# EAGLE board SparkFun-ESP8266-Development-Board-Panel-v10a (EAGLE 7.6.0), part 1 of 7
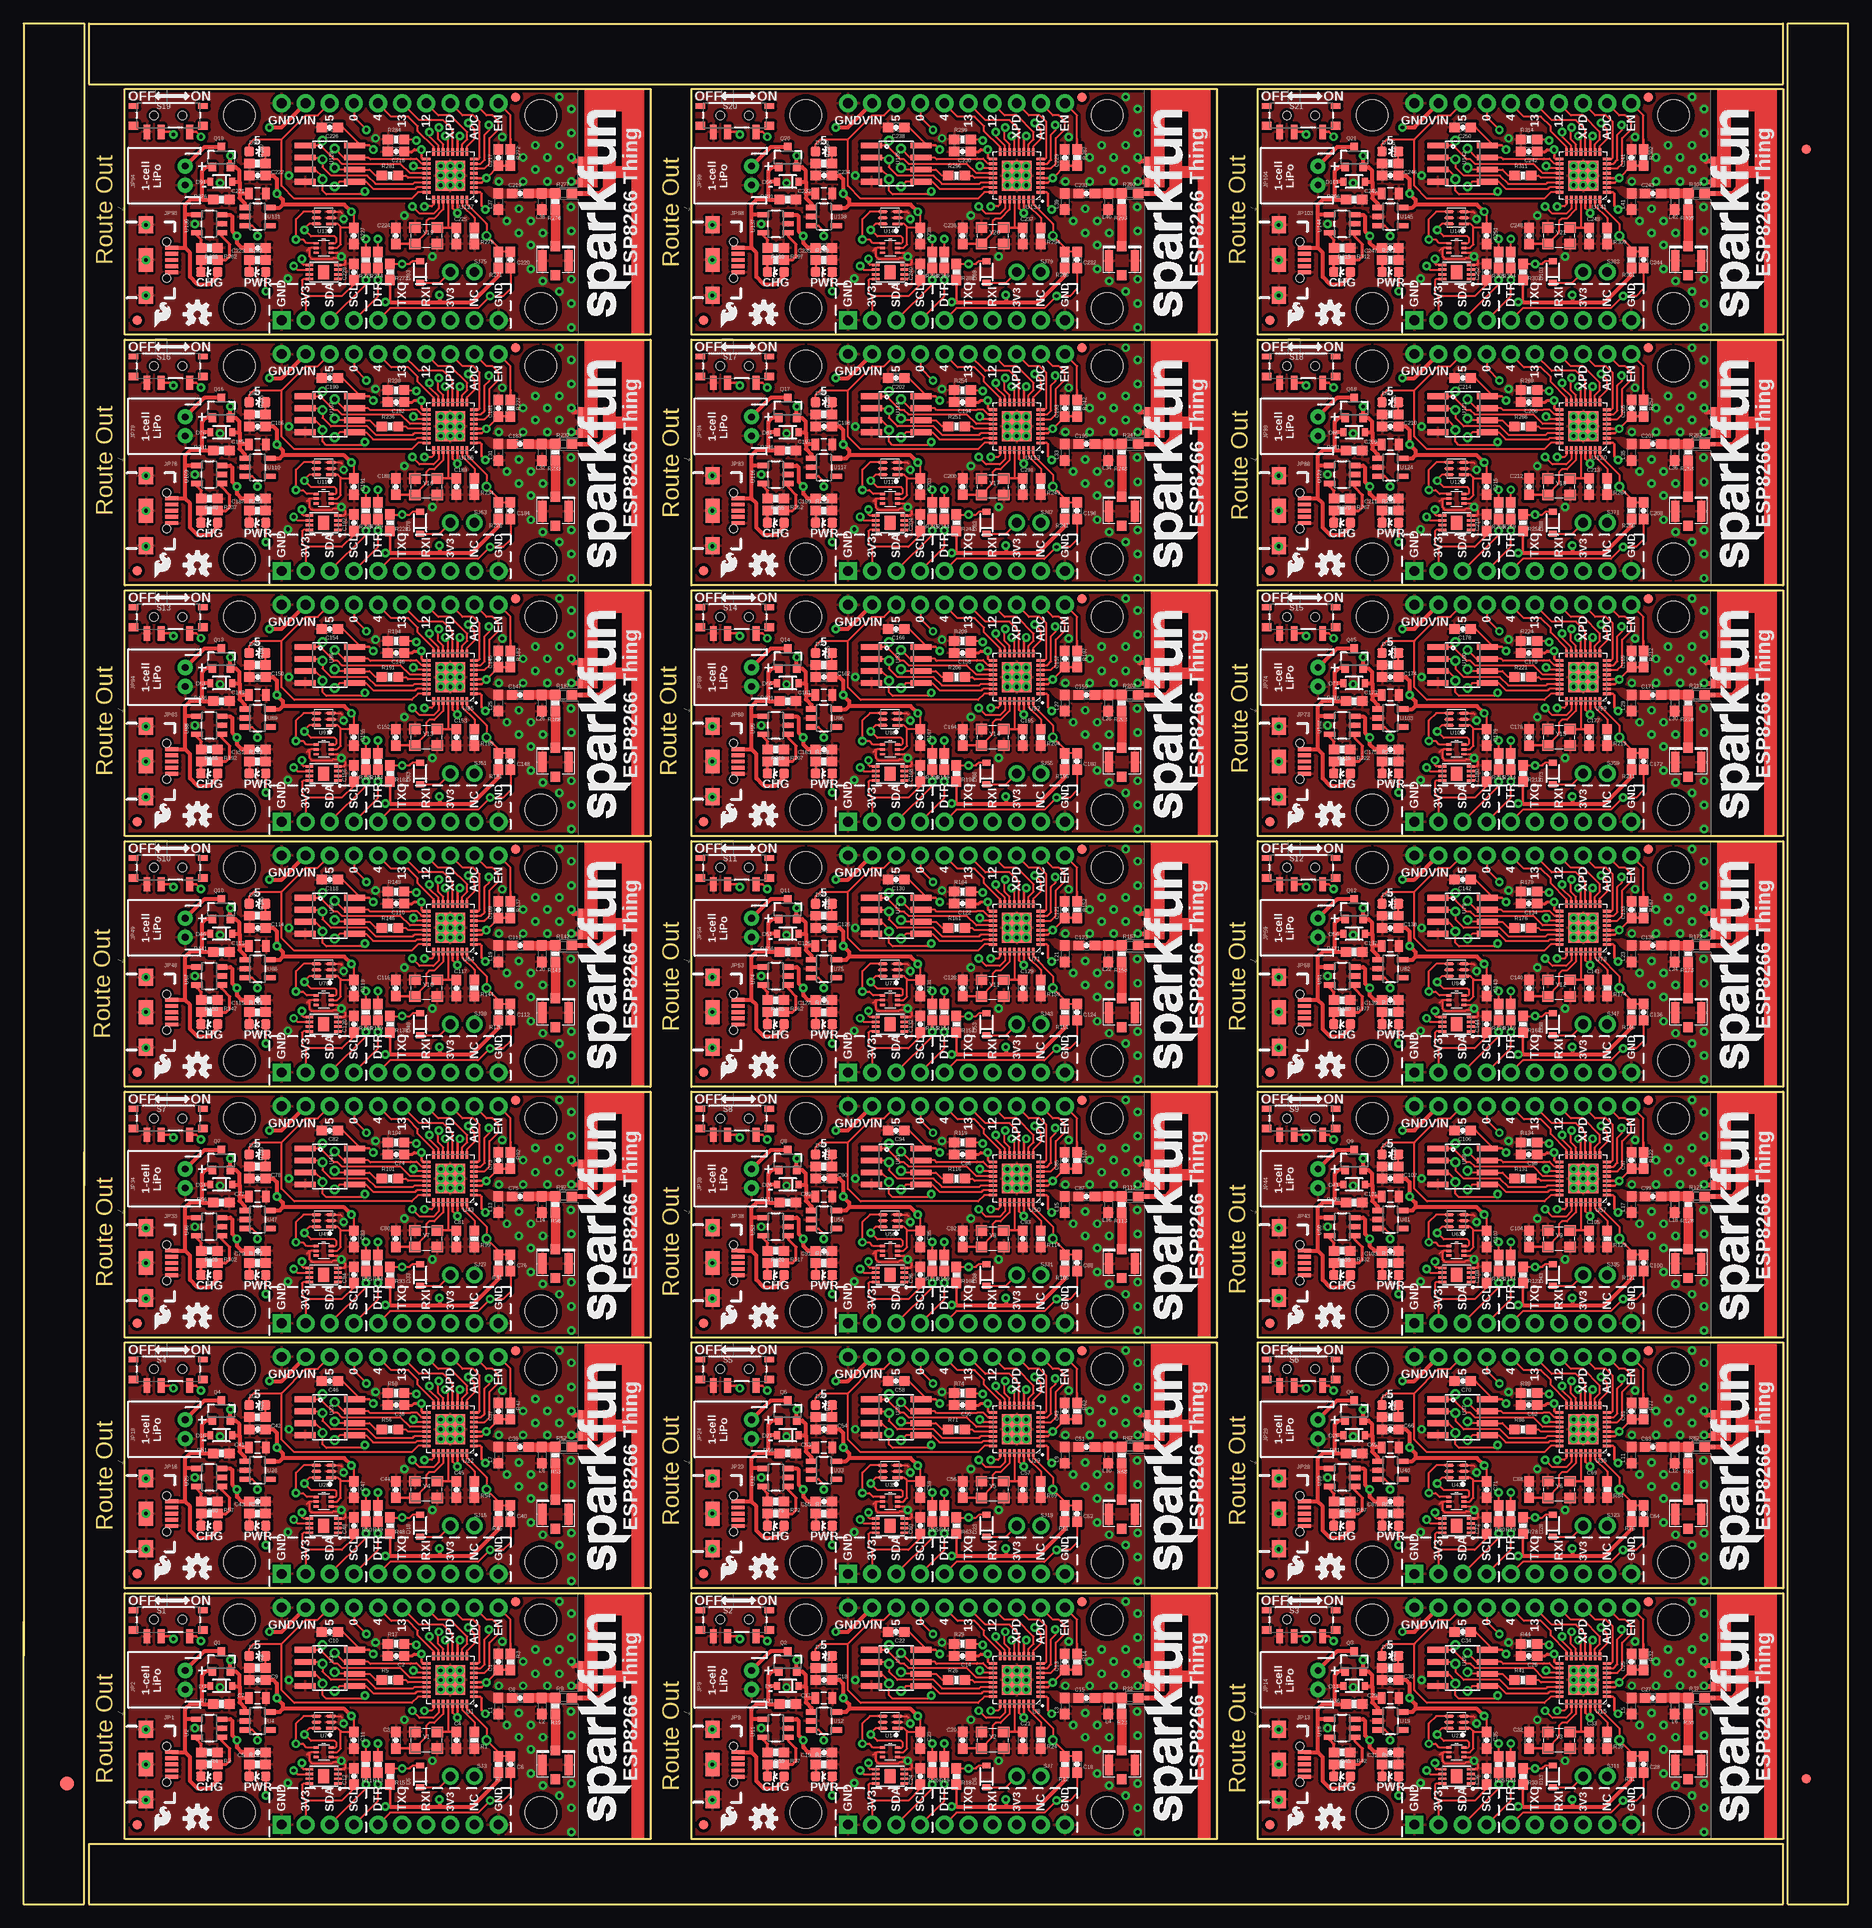
[diagram p0: board, top side]
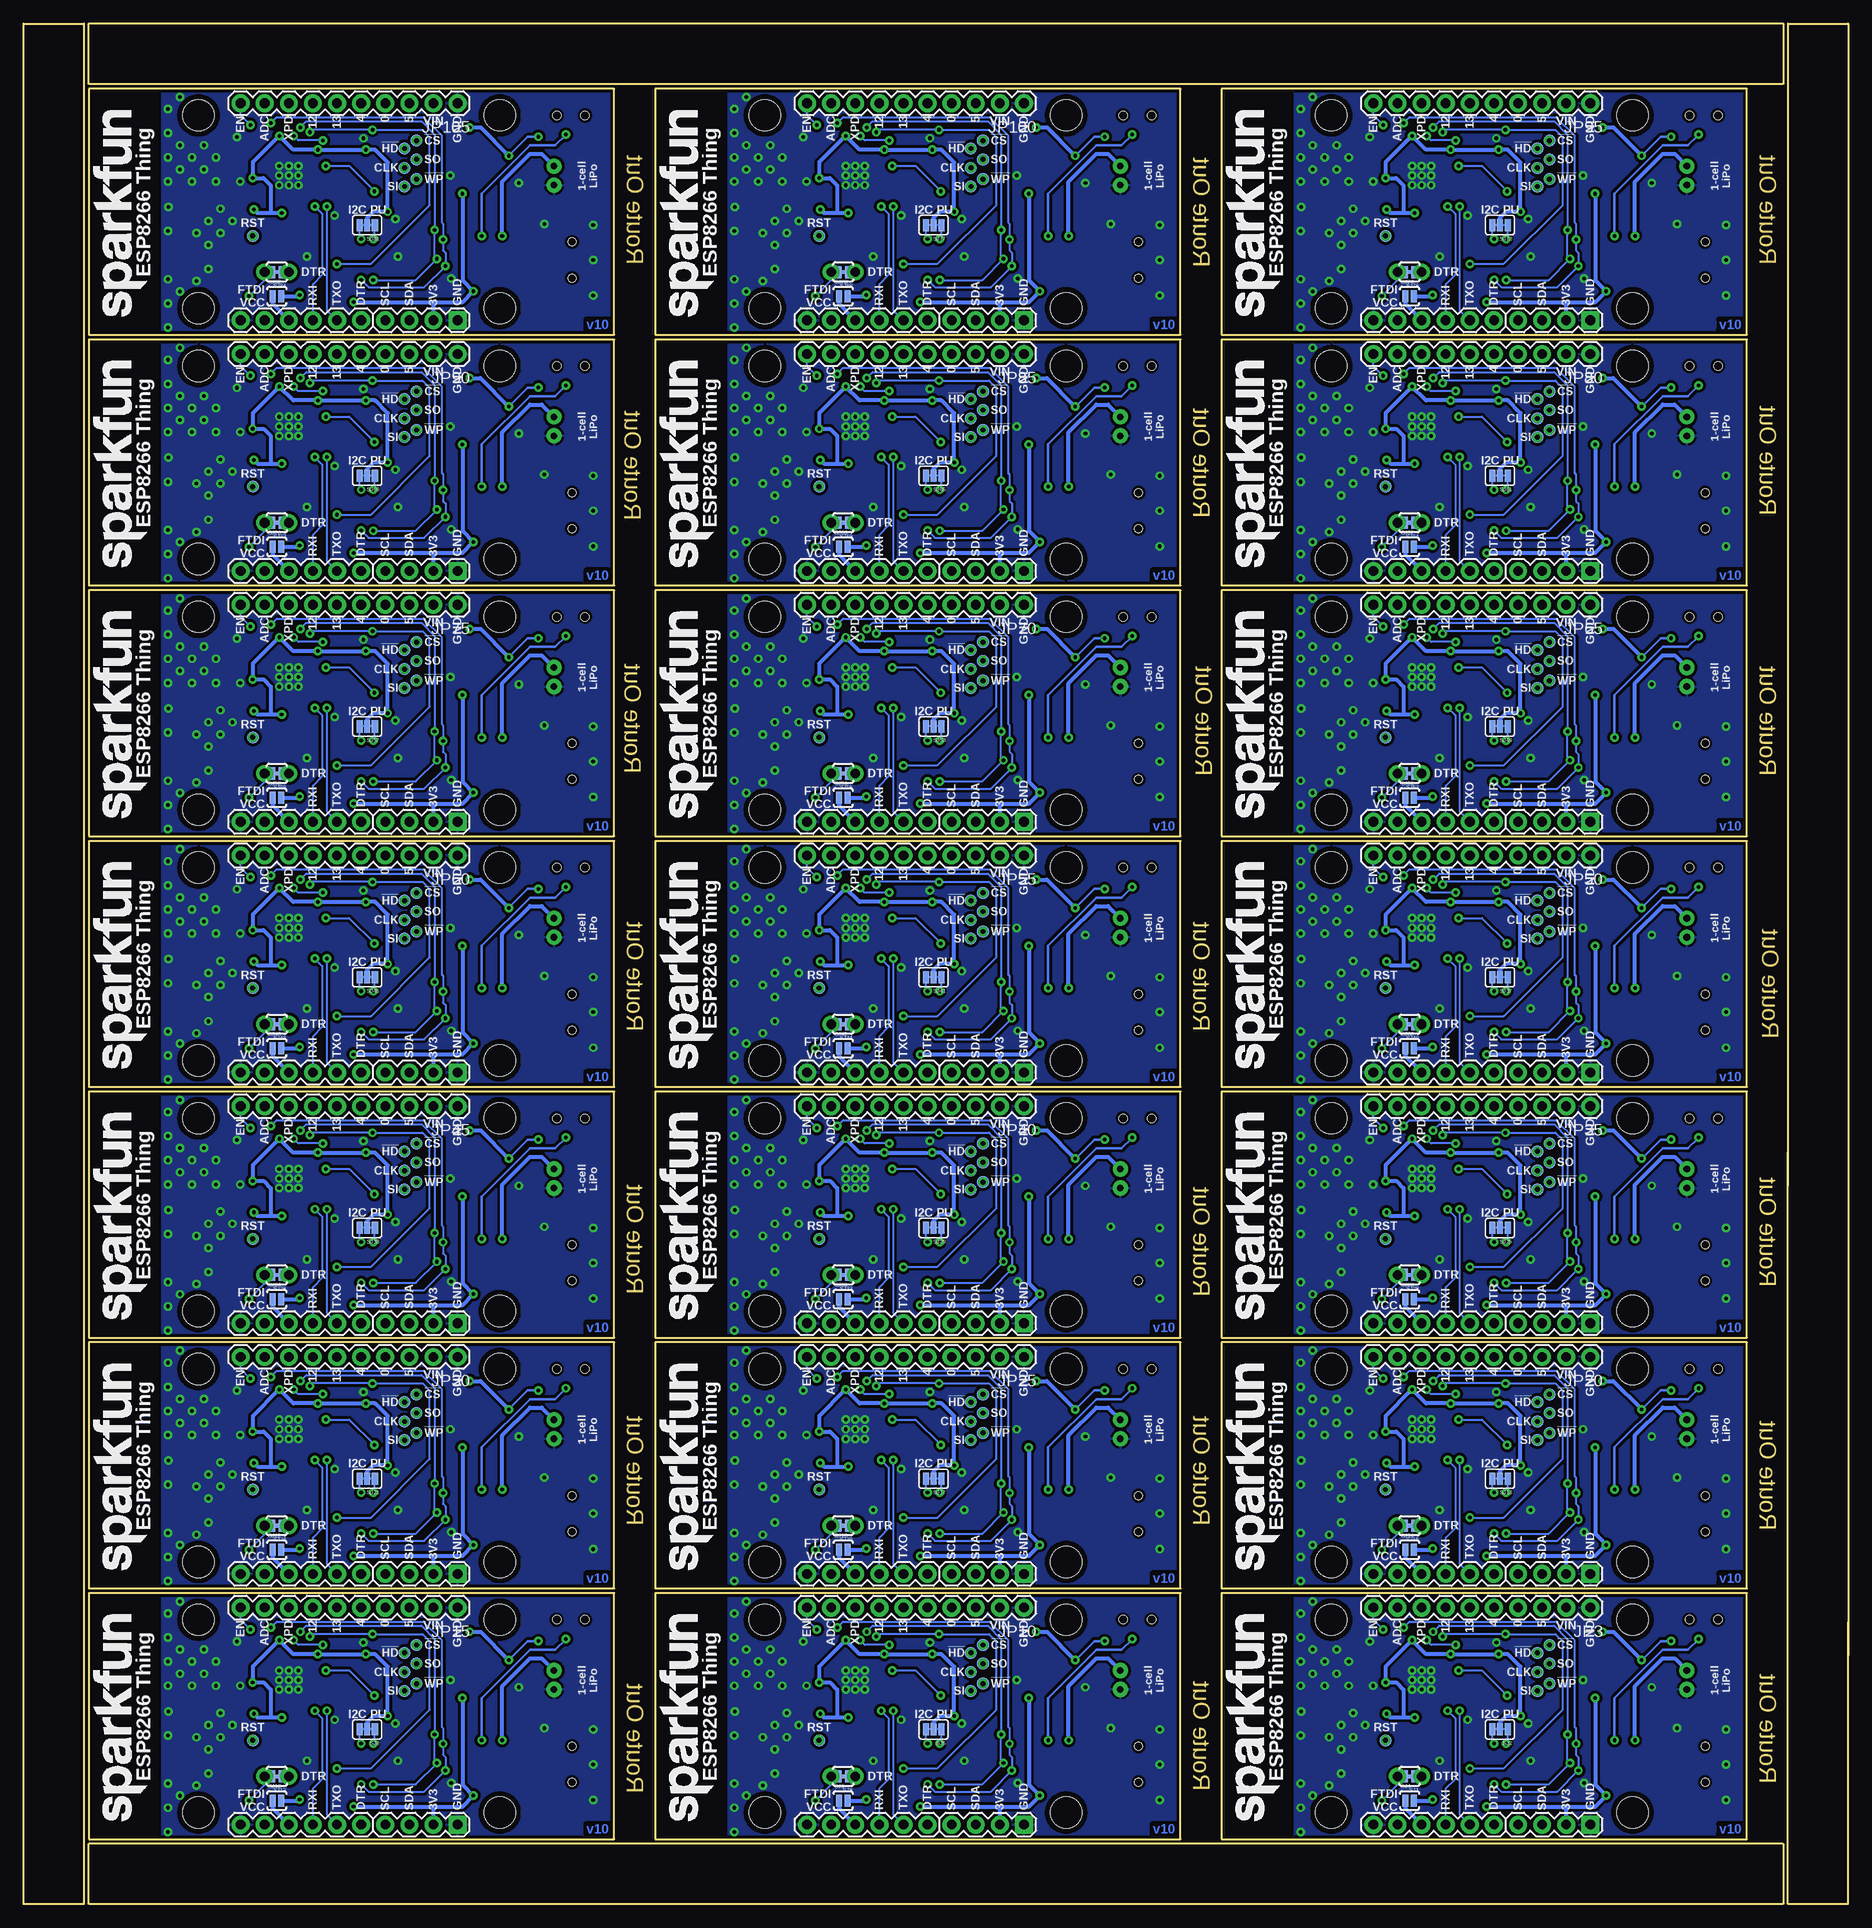
[diagram p1: board, bottom side, seen from below]

Size 192.28 x 198.12 mm. Coordinates in mm from the lower left corner, seen from the top.
Outline: 6.35,79.25 6.35,0 0,0 0,29.72
Outline: 0,26.16 0,198.12 6.35,198.12 6.35,75.69
Outline: 10.67,6.86 10.67,32.77 66.04,32.77 66.04,6.86 10.67,6.86
Outline: 70.36,6.86 70.36,32.77 125.73,32.77 125.73,6.86 70.36,6.86
Outline: 130.05,6.86 130.05,32.77 185.42,32.77 185.42,6.86 130.05,6.86
Outline: 10.67,33.27 10.67,59.18 66.04,59.18 66.04,33.27 10.67,33.27
Outline: 70.36,33.27 70.36,59.18 125.73,59.18 125.73,33.27 70.36,33.27
Outline: 130.05,33.27 130.05,59.18 185.42,59.18 185.42,33.27 130.05,33.27
Outline: 10.67,59.69 10.67,85.6 66.04,85.6 66.04,59.69 10.67,59.69
Outline: 70.36,59.69 70.36,85.6 125.73,85.6 125.73,59.69 70.36,59.69
Outline: 130.05,59.69 130.05,85.6 185.42,85.6 185.42,59.69 130.05,59.69
Outline: 10.67,86.11 10.67,112.01 66.04,112.01 66.04,86.11 10.67,86.11
Outline: 70.36,86.11 70.36,112.01 125.73,112.01 125.73,86.11 70.36,86.11
Outline: 130.05,86.11 130.05,112.01 185.42,112.01 185.42,86.11 130.05,86.11
Outline: 10.67,112.52 10.67,138.43 66.04,138.43 66.04,112.52 10.67,112.52
Outline: 70.36,112.52 70.36,138.43 125.73,138.43 125.73,112.52 70.36,112.52
Outline: 130.05,112.52 130.05,138.43 185.42,138.43 185.42,112.52 130.05,112.52
Outline: 10.67,138.94 10.67,164.85 66.04,164.85 66.04,138.94 10.67,138.94
Outline: 70.36,138.94 70.36,164.85 125.73,164.85 125.73,138.94 70.36,138.94
Outline: 130.05,138.94 130.05,164.85 185.42,164.85 185.42,138.94 130.05,138.94
Outline: 10.67,165.35 10.67,191.26 66.04,191.26 66.04,165.35 10.67,165.35
Outline: 70.36,165.35 70.36,191.26 125.73,191.26 125.73,165.35 70.36,165.35
Outline: 130.05,165.35 130.05,191.26 185.42,191.26 185.42,165.35 130.05,165.35
Outline: 6.86,0 185.42,0 185.42,6.35 6.86,6.35 6.86,0
Outline: 192.28,0 192.28,198.12 185.93,198.12 185.93,0 192.28,0
Outline: 185.42,191.77 185.42,198.12 6.86,198.12 6.86,191.77 185.42,191.77
Copper layers (1*16): Top 0.035mm / dielectric 1.5mm / Bottom 0.035mm
Design rules "SparkFun-2-layer-STANDARD": minimum track width 10mil, minimum drill 20mil, track to track 10mil, track to pad 8mil, pad to pad 8mil, via to via 10mil, smd to smd 8mil, copper to edge 8mil, drill to drill 8mil, minimum pad ring 10mil, minimum via ring 10mil, stop-mask expansion 4mil, vias tented up to drill 25mil, thermal gap 10mil
tRestrict: 63 lines

## Footprints (pad centres in the part's own frame; a part is rotated, then mirrored left to right if it is on the bottom)
0603-CAP = smd 1.1 x 1: 1 -0.85,0; 2 0.85,0
0805 = smd 0.8 x 1.2: 1 -0.9,0; 2 0.9,0
LED-0603 = smd 1 x 1: A 0,-0.877; C 0,0.877
SOD-323 = smd 0.63 x 0.83: A 1.15,0; C -1.15,0
TRACE_ANTENNA_2.4GHZ_25.7MM = smd 0.46 x 0.46: ANT 0,0.23 | smd 1 x 0.46: GND -1.18,0.23; GND2 -3.38,0.23
FIDUCIAL-1.5X3 = smd 1.5 x 1.5: 1 0,0
FIDUCIAL-1X2 = smd 1 x 1: 1 0,0
U.FL = smd 2.2 x 0.85: P$1 0,1.375; P$2 0,-1.375 | smd 1.05 x 1: P$3 1.525,0; P$4 -1.525,0
USB-B-MICRO-SMD_V03 = smd 1.4 x 0.4: D+1 2.7,0; D-1 2.7,0.65; GND1 2.7,-1.3; ID1 2.7,-0.65; VBUS1 2.7,1.3 | smd 1.5 x 1.8: SHIELD1 0,3.7; SHIELD2 0,-3.7 | smd 1.5 x 2.5: SHIELD3 0,0 | hole 0.85: 2.2,1.9; 2.2,-1.9
JST-2-PTH = drill 0.7 pad 1.6: 1 -1,0; 2 1,0
1X10 = drill 1.016 pad 1.88: 1 0,0; 2 2.54,0; 3 5.08,0; 4 7.62,0; 5 10.16,0; 6 12.7,0; 7 15.24,0; 8 17.78,0; 9 20.32,0; 10 22.86,0
FTDI_BASIC = drill 1.016 pad 1.88: CTS 10.16,0; DTR 0,0; GND 12.7,0; RXI 2.54,0; TXO 5.08,0; VCC 7.62,0
1X04 = drill 1.016 pad 1.88 square: 1 0,0 | drill 1.016 pad 1.88: 2 2.54,0; 3 5.08,0; 4 7.62,0
0603 = smd 1.1 x 1: 1 -0.85,0; 2 0.85,0
SOT23-3 = smd 0.8 x 0.9: 1 -0.95,-1; 2 0.95,-1; 3 0,1.1
0603-RES = smd 1.1 x 1: 1 -0.85,0; 2 0.85,0
SWITCH-SPST-SMD-A = smd 0.7 x 1.5: 1 -2.25,-1.75; 2 -0.75,-1.75; 3 2.25,-1.75 | smd 1 x 0.6: GND1 -3.65,1; GND3 3.65,1 | smd 1 x 0.8: GND2 -3.65,-1.1; GND4 3.65,-1.1 | hole 0.9: -1.5,0; 1.5,0
PAD-JUMPER-2-NC_BY_TRACE_YES_SILK = smd 0.635 x 1.27: 1 -0.508,0; 2 0.508,0
PAD-JUMPER-3-3OF3_NC_BY_TRACE_YES_SILK_FULL_BOX = smd 0.635 x 1.27: 1 -0.813,0; 2 0,0; 3 0.813,0
PTH-JUMPER-NC_BOTTOM_NO_SILK = drill 1.016 pad 1.778: 1 -1.27,0; 2 1.27,0 | smd 1.27 x 0.381 bottom: P$1 0,0
PAD-JUMPER-2-NO_YES_SILK = smd 0.635 x 1.27: 1 -0.45,0; 2 0.45,0
STAND-OFF = hole 3.302: 0,0
PAD.03X.05 = smd 1.27 x 1.27: P$1 0,0
QFN32 = smd 0.8 x 0.285: 1 -2.5,1.75; 2 -2.5,1.25; 3 -2.5,0.75; 4 -2.5,0.25; 5 -2.5,-0.25; 6 -2.5,-0.75; 7 -2.5,-1.25; 8 -2.5,-1.75; 17 2.5,-1.75; 18 2.5,-1.25; 19 2.5,-0.75; 20 2.5,-0.25; 21 2.5,0.25; 22 2.5,0.75; 23 2.5,1.25; 24 2.5,1.75 | smd 0.285 x 0.8: 9 -1.75,-2.5; 10 -1.25,-2.5; 11 -0.75,-2.5; 12 -0.25,-2.5; 13 0.25,-2.5; 14 0.75,-2.5; 15 1.25,-2.5; 16 1.75,-2.5; 25 1.75,2.5; 26 1.25,2.5; 27 0.75,2.5; 28 0.25,2.5; 29 -0.25,2.5; 30 -0.75,2.5; 31 -1.25,2.5; 32 -1.75,2.5 | smd 3.15 x 3.15: EP 0,0
SOT23-5 = smd 0.55 x 1.2: 1 -0.95,-1.3; 2 0,-1.3; 3 0.95,-1.3; 4 0.95,1.3; 5 -0.95,1.3
SO08 = smd 0.61 x 2.21: 1 -1.905,-2.616; 2 -0.635,-2.616; 3 0.635,-2.616; 4 1.905,-2.616; 5 1.905,2.616; 6 0.635,2.616; 7 -0.635,2.616; 8 -1.905,2.616
UDFN8 = smd 0.8 x 0.25: 1 -1.5,0.75; 2 -1.5,0.25; 3 -1.5,-0.25; 4 -1.5,-0.75; 5 1.5,-0.75; 6 1.5,-0.25; 7 1.5,0.25; 8 1.5,0.75 | smd 1.3 x 1.5: EP 0,0
SOT563-2 = smd 0.508 x 0.249: 1 -0.8,0.498; 2 -0.8,0.003; 3 -0.8,-0.506; 4 0.776,-0.506; 5 0.776,0.003; 6 0.776,0.498
FN-6 = smd 1.05 x 0.3: 1 -0.775,0.65; 2 -0.775,0; 3 -0.775,-0.65; 4 0.775,-0.65; 5 0.775,0; 6 0.775,0.65
CRYSTAL-SMD-3.2X2.5 = smd 1.2 x 1.1: 1 -1.175,-0.875; 2 1.175,-0.875; 3 1.175,0.875; 4 -1.175,0.875

## Placement (x,y rotation side)
C1  10uF  [0603-CAP]  50.04,25.53 90 top
C2  0.1uF  [0603-CAP]  39.24,26.16 180 top
C3  10pF  [0603-CAP]  39.24,17.27 270 top
C4  10pF  [0603-CAP]  45.59,17.27 90 top
C5  4.7uF  [0603-CAP]  24.64,16 0 top
C6  1.0uF  [0603-CAP]  51.31,14.73 270 top
C7  1.0uF  [0805]  24.64,21.72 0 top
C8  5.6pF  [0603-CAP]  52.32,21.74 0 top
C9  2.2uF  [0603-CAP]  24.64,23.62 180 top
C10  0.1uF  [0603-CAP]  32.26,28.7 180 top
C11  0.1uF  [0603-CAP]  34.8,17.27 270 top
C12  0.1uF  [0603-CAP]  34.8,13.46 90 top
C13  10uF  [0603-CAP]  109.73,25.53 90 top
C14  0.1uF  [0603-CAP]  98.93,26.16 180 top
C15  5.6pF  [0603-CAP]  112.01,21.74 0 top
C16  1.0uF  [0603-CAP]  111,14.73 270 top
C17  1.0uF  [0805]  84.33,21.72 0 top
C18  2.2uF  [0603-CAP]  84.33,23.62 180 top
C19  4.7uF  [0603-CAP]  84.33,16 0 top
C20  10pF  [0603-CAP]  98.93,17.27 270 top
C21  10pF  [0603-CAP]  105.28,17.27 90 top
C22  0.1uF  [0603-CAP]  91.95,28.7 180 top
C23  0.1uF  [0603-CAP]  94.49,17.27 270 top
C24  0.1uF  [0603-CAP]  94.49,13.46 90 top
C25  10uF  [0603-CAP]  169.42,25.53 90 top
C26  0.1uF  [0603-CAP]  158.62,26.16 180 top
C27  5.6pF  [0603-CAP]  171.7,21.74 0 top
C28  1.0uF  [0603-CAP]  170.69,14.73 270 top
C29  1.0uF  [0805]  144.02,21.72 0 top
C30  2.2uF  [0603-CAP]  144.02,23.62 180 top
C31  4.7uF  [0603-CAP]  144.02,16 0 top
C32  10pF  [0603-CAP]  158.62,17.27 270 top
C33  10pF  [0603-CAP]  164.97,17.27 90 top
C34  0.1uF  [0603-CAP]  151.64,28.7 180 top
C35  0.1uF  [0603-CAP]  154.18,17.27 270 top
C36  0.1uF  [0603-CAP]  154.18,13.46 90 top
C37  10uF  [0603-CAP]  50.04,51.94 90 top
C38  0.1uF  [0603-CAP]  39.24,52.58 180 top
C39  5.6pF  [0603-CAP]  52.32,48.16 0 top
C40  1.0uF  [0603-CAP]  51.31,41.15 270 top
C41  1.0uF  [0805]  24.64,48.13 0 top
C42  2.2uF  [0603-CAP]  24.64,50.04 180 top
C43  4.7uF  [0603-CAP]  24.64,42.42 0 top
C44  10pF  [0603-CAP]  39.24,43.69 270 top
C45  10pF  [0603-CAP]  45.59,43.69 90 top
C46  0.1uF  [0603-CAP]  32.26,55.12 180 top
C47  0.1uF  [0603-CAP]  34.8,43.69 270 top
C48  0.1uF  [0603-CAP]  34.8,39.88 90 top
C49  10uF  [0603-CAP]  109.73,51.94 90 top
C50  0.1uF  [0603-CAP]  98.93,52.58 180 top
C51  5.6pF  [0603-CAP]  112.01,48.16 0 top
C52  1.0uF  [0603-CAP]  111,41.15 270 top
C53  1.0uF  [0805]  84.33,48.13 0 top
C54  2.2uF  [0603-CAP]  84.33,50.04 180 top
C55  4.7uF  [0603-CAP]  84.33,42.42 0 top
C56  10pF  [0603-CAP]  98.93,43.69 270 top
C57  10pF  [0603-CAP]  105.28,43.69 90 top
C58  0.1uF  [0603-CAP]  91.95,55.12 180 top
C59  0.1uF  [0603-CAP]  94.49,43.69 270 top
C60  0.1uF  [0603-CAP]  94.49,39.88 90 top
C61  10uF  [0603-CAP]  169.42,51.94 90 top
C62  0.1uF  [0603-CAP]  158.62,52.58 180 top
C63  5.6pF  [0603-CAP]  171.7,48.16 0 top
C64  1.0uF  [0603-CAP]  170.69,41.15 270 top
C65  1.0uF  [0805]  144.02,48.13 0 top
C66  2.2uF  [0603-CAP]  144.02,50.04 180 top
C67  4.7uF  [0603-CAP]  144.02,42.42 0 top
C68  10pF  [0603-CAP]  158.62,43.69 270 top
C69  10pF  [0603-CAP]  164.97,43.69 90 top
C70  0.1uF  [0603-CAP]  151.64,55.12 180 top
C71  0.1uF  [0603-CAP]  154.18,43.69 270 top
C72  0.1uF  [0603-CAP]  154.18,39.88 90 top
C73  10uF  [0603-CAP]  50.04,78.36 90 top
C74  0.1uF  [0603-CAP]  39.24,78.99 180 top
C75  5.6pF  [0603-CAP]  52.32,74.57 0 top
C76  1.0uF  [0603-CAP]  51.31,67.56 270 top
C77  1.0uF  [0805]  24.64,74.55 0 top
C78  2.2uF  [0603-CAP]  24.64,76.45 180 top
C79  4.7uF  [0603-CAP]  24.64,68.83 0 top
C80  10pF  [0603-CAP]  39.24,70.1 270 top
C81  10pF  [0603-CAP]  45.59,70.1 90 top
C82  0.1uF  [0603-CAP]  32.26,81.53 180 top
C83  0.1uF  [0603-CAP]  34.8,70.1 270 top
C84  0.1uF  [0603-CAP]  34.8,66.29 90 top
C85  10uF  [0603-CAP]  109.73,78.36 90 top
C86  0.1uF  [0603-CAP]  98.93,78.99 180 top
C87  5.6pF  [0603-CAP]  112.01,74.57 0 top
C88  1.0uF  [0603-CAP]  111,67.56 270 top
C89  1.0uF  [0805]  84.33,74.55 0 top
C90  2.2uF  [0603-CAP]  84.33,76.45 180 top
C91  4.7uF  [0603-CAP]  84.33,68.83 0 top
C92  10pF  [0603-CAP]  98.93,70.1 270 top
C93  10pF  [0603-CAP]  105.28,70.1 90 top
C94  0.1uF  [0603-CAP]  91.95,81.53 180 top
C95  0.1uF  [0603-CAP]  94.49,70.1 270 top
C96  0.1uF  [0603-CAP]  94.49,66.29 90 top
C97  10uF  [0603-CAP]  169.42,78.36 90 top
C98  0.1uF  [0603-CAP]  158.62,78.99 180 top
C99  5.6pF  [0603-CAP]  171.7,74.57 0 top
C100  1.0uF  [0603-CAP]  170.69,67.56 270 top
C101  1.0uF  [0805]  144.02,74.55 0 top
C102  2.2uF  [0603-CAP]  144.02,76.45 180 top
C103  4.7uF  [0603-CAP]  144.02,68.83 0 top
C104  10pF  [0603-CAP]  158.62,70.1 270 top
C105  10pF  [0603-CAP]  164.97,70.1 90 top
C106  0.1uF  [0603-CAP]  151.64,81.53 180 top
C107  0.1uF  [0603-CAP]  154.18,70.1 270 top
C108  0.1uF  [0603-CAP]  154.18,66.29 90 top
C109  10uF  [0603-CAP]  50.04,104.78 90 top
C110  0.1uF  [0603-CAP]  39.24,105.41 180 top
C111  5.6pF  [0603-CAP]  52.32,100.99 0 top
C112  1.0uF  [0603-CAP]  51.31,93.98 270 top
C113  1.0uF  [0805]  24.64,100.97 0 top
C114  2.2uF  [0603-CAP]  24.64,102.87 180 top
C115  4.7uF  [0603-CAP]  24.64,95.25 0 top
C116  10pF  [0603-CAP]  39.24,96.52 270 top
C117  10pF  [0603-CAP]  45.59,96.52 90 top
C118  0.1uF  [0603-CAP]  32.26,107.95 180 top
C119  0.1uF  [0603-CAP]  34.8,96.52 270 top
C120  0.1uF  [0603-CAP]  34.8,92.71 90 top
C121  10uF  [0603-CAP]  109.73,104.78 90 top
C122  0.1uF  [0603-CAP]  98.93,105.41 180 top
C123  5.6pF  [0603-CAP]  112.01,100.99 0 top
C124  1.0uF  [0603-CAP]  111,93.98 270 top
C125  1.0uF  [0805]  84.33,100.97 0 top
C126  2.2uF  [0603-CAP]  84.33,102.87 180 top
C127  4.7uF  [0603-CAP]  84.33,95.25 0 top
C128  10pF  [0603-CAP]  98.93,96.52 270 top
C129  10pF  [0603-CAP]  105.28,96.52 90 top
C130  0.1uF  [0603-CAP]  91.95,107.95 180 top
C131  0.1uF  [0603-CAP]  94.49,96.52 270 top
C132  0.1uF  [0603-CAP]  94.49,92.71 90 top
C133  10uF  [0603-CAP]  169.42,104.78 90 top
C134  0.1uF  [0603-CAP]  158.62,105.41 180 top
C135  5.6pF  [0603-CAP]  171.7,100.99 0 top
C136  1.0uF  [0603-CAP]  170.69,93.98 270 top
C137  1.0uF  [0805]  144.02,100.97 0 top
C138  2.2uF  [0603-CAP]  144.02,102.87 180 top
C139  4.7uF  [0603-CAP]  144.02,95.25 0 top
C140  10pF  [0603-CAP]  158.62,96.52 270 top
C141  10pF  [0603-CAP]  164.97,96.52 90 top
C142  0.1uF  [0603-CAP]  151.64,107.95 180 top
C143  0.1uF  [0603-CAP]  154.18,96.52 270 top
C144  0.1uF  [0603-CAP]  154.18,92.71 90 top
C145  10uF  [0603-CAP]  50.04,131.19 90 top
C146  0.1uF  [0603-CAP]  39.24,131.83 180 top
C147  5.6pF  [0603-CAP]  52.32,127.41 0 top
C148  1.0uF  [0603-CAP]  51.31,120.4 270 top
C149  1.0uF  [0805]  24.64,127.38 0 top
C150  2.2uF  [0603-CAP]  24.64,129.29 180 top
C151  4.7uF  [0603-CAP]  24.64,121.67 0 top
C152  10pF  [0603-CAP]  39.24,122.94 270 top
C153  10pF  [0603-CAP]  45.59,122.94 90 top
C154  0.1uF  [0603-CAP]  32.26,134.37 180 top
C155  0.1uF  [0603-CAP]  34.8,122.94 270 top
C156  0.1uF  [0603-CAP]  34.8,119.13 90 top
C157  10uF  [0603-CAP]  109.73,131.19 90 top
C158  0.1uF  [0603-CAP]  98.93,131.83 180 top
C159  5.6pF  [0603-CAP]  112.01,127.41 0 top
C160  1.0uF  [0603-CAP]  111,120.4 270 top
C161  1.0uF  [0805]  84.33,127.38 0 top
C162  2.2uF  [0603-CAP]  84.33,129.29 180 top
C163  4.7uF  [0603-CAP]  84.33,121.67 0 top
C164  10pF  [0603-CAP]  98.93,122.94 270 top
C165  10pF  [0603-CAP]  105.28,122.94 90 top
C166  0.1uF  [0603-CAP]  91.95,134.37 180 top
C167  0.1uF  [0603-CAP]  94.49,122.94 270 top
C168  0.1uF  [0603-CAP]  94.49,119.13 90 top
C169  10uF  [0603-CAP]  169.42,131.19 90 top
C170  0.1uF  [0603-CAP]  158.62,131.83 180 top
C171  5.6pF  [0603-CAP]  171.7,127.41 0 top
C172  1.0uF  [0603-CAP]  170.69,120.4 270 top
C173  1.0uF  [0805]  144.02,127.38 0 top
C174  2.2uF  [0603-CAP]  144.02,129.29 180 top
C175  4.7uF  [0603-CAP]  144.02,121.67 0 top
C176  10pF  [0603-CAP]  158.62,122.94 270 top
C177  10pF  [0603-CAP]  164.97,122.94 90 top
C178  0.1uF  [0603-CAP]  151.64,134.37 180 top
C179  0.1uF  [0603-CAP]  154.18,122.94 270 top
C180  0.1uF  [0603-CAP]  154.18,119.13 90 top
C181  10uF  [0603-CAP]  50.04,157.61 90 top
C182  0.1uF  [0603-CAP]  39.24,158.24 180 top
C183  5.6pF  [0603-CAP]  52.32,153.82 0 top
C184  1.0uF  [0603-CAP]  51.31,146.81 270 top
C185  1.0uF  [0805]  24.64,153.8 0 top
C186  2.2uF  [0603-CAP]  24.64,155.7 180 top
C187  4.7uF  [0603-CAP]  24.64,148.08 0 top
C188  10pF  [0603-CAP]  39.24,149.35 270 top
C189  10pF  [0603-CAP]  45.59,149.35 90 top
C190  0.1uF  [0603-CAP]  32.26,160.78 180 top
C191  0.1uF  [0603-CAP]  34.8,149.35 270 top
C192  0.1uF  [0603-CAP]  34.8,145.54 90 top
C193  10uF  [0603-CAP]  109.73,157.61 90 top
C194  0.1uF  [0603-CAP]  98.93,158.24 180 top
C195  5.6pF  [0603-CAP]  112.01,153.82 0 top
C196  1.0uF  [0603-CAP]  111,146.81 270 top
C197  1.0uF  [0805]  84.33,153.8 0 top
C198  2.2uF  [0603-CAP]  84.33,155.7 180 top
C199  4.7uF  [0603-CAP]  84.33,148.08 0 top
C200  10pF  [0603-CAP]  98.93,149.35 270 top
C201  10pF  [0603-CAP]  105.28,149.35 90 top
C202  0.1uF  [0603-CAP]  91.95,160.78 180 top
C203  0.1uF  [0603-CAP]  94.49,149.35 270 top
C204  0.1uF  [0603-CAP]  94.49,145.54 90 top
C205  10uF  [0603-CAP]  169.42,157.61 90 top
C206  0.1uF  [0603-CAP]  158.62,158.24 180 top
C207  5.6pF  [0603-CAP]  171.7,153.82 0 top
C208  1.0uF  [0603-CAP]  170.69,146.81 270 top
C209  1.0uF  [0805]  144.02,153.8 0 top
C210  2.2uF  [0603-CAP]  144.02,155.7 180 top
C211  4.7uF  [0603-CAP]  144.02,148.08 0 top
C212  10pF  [0603-CAP]  158.62,149.35 270 top
C213  10pF  [0603-CAP]  164.97,149.35 90 top
C214  0.1uF  [0603-CAP]  151.64,160.78 180 top
C215  0.1uF  [0603-CAP]  154.18,149.35 270 top
C216  0.1uF  [0603-CAP]  154.18,145.54 90 top
C217  10uF  [0603-CAP]  50.04,184.02 90 top
C218  0.1uF  [0603-CAP]  39.24,184.66 180 top
C219  5.6pF  [0603-CAP]  52.32,180.24 0 top
C220  1.0uF  [0603-CAP]  51.31,173.23 270 top
C221  1.0uF  [0805]  24.64,180.21 0 top
C222  2.2uF  [0603-CAP]  24.64,182.12 180 top
C223  4.7uF  [0603-CAP]  24.64,174.5 0 top
C224  10pF  [0603-CAP]  39.24,175.77 270 top
C225  10pF  [0603-CAP]  45.59,175.77 90 top
C226  0.1uF  [0603-CAP]  32.26,187.2 180 top
C227  0.1uF  [0603-CAP]  34.8,175.77 270 top
C228  0.1uF  [0603-CAP]  34.8,171.96 90 top
C229  10uF  [0603-CAP]  109.73,184.02 90 top
C230  0.1uF  [0603-CAP]  98.93,184.66 180 top
C231  5.6pF  [0603-CAP]  112.01,180.24 0 top
C232  1.0uF  [0603-CAP]  111,173.23 270 top
C233  1.0uF  [0805]  84.33,180.21 0 top
C234  2.2uF  [0603-CAP]  84.33,182.12 180 top
C235  4.7uF  [0603-CAP]  84.33,174.5 0 top
C236  10pF  [0603-CAP]  98.93,175.77 270 top
C237  10pF  [0603-CAP]  105.28,175.77 90 top
C238  0.1uF  [0603-CAP]  91.95,187.2 180 top
C239  0.1uF  [0603-CAP]  94.49,175.77 270 top
C240  0.1uF  [0603-CAP]  94.49,171.96 90 top
C241  10uF  [0603-CAP]  169.42,184.02 90 top
C242  0.1uF  [0603-CAP]  158.62,184.66 180 top
C243  5.6pF  [0603-CAP]  171.7,180.24 0 top
C244  1.0uF  [0603-CAP]  170.69,173.23 270 top
C245  1.0uF  [0805]  144.02,180.21 0 top
C246  2.2uF  [0603-CAP]  144.02,182.12 180 top
C247  4.7uF  [0603-CAP]  144.02,174.5 0 top
C248  10pF  [0603-CAP]  158.62,175.77 270 top
C249  10pF  [0603-CAP]  164.97,175.77 90 top
C250  0.1uF  [0603-CAP]  151.64,187.2 180 top
C251  0.1uF  [0603-CAP]  154.18,175.77 270 top
C252  0.1uF  [0603-CAP]  154.18,171.96 90 top
D1  YELLOW  [LED-0603]  19.56,13.46 90 top
D2  GREEN  [LED-0603]  24.64,26.16 270 top
D3  BAT20J  [SOD-323]  20.83,22.99 180 top
D4  RED  [LED-0603]  24.64,13.46 90 top
D5  [SOD-323]  41.78,13.46 90 top
D6  BAT20J  [SOD-323]  80.52,22.99 180 top
D7  YELLOW  [LED-0603]  79.25,13.46 90 top
D8  [SOD-323]  101.47,13.46 90 top
D9  RED  [LED-0603]  84.33,13.46 90 top
D10  GREEN  [LED-0603]  84.33,26.16 270 top
D11  BAT20J  [SOD-323]  140.21,22.99 180 top
D12  YELLOW  [LED-0603]  138.94,13.46 90 top
D13  [SOD-323]  161.16,13.46 90 top
D14  RED  [LED-0603]  144.02,13.46 90 top
D15  GREEN  [LED-0603]  144.02,26.16 270 top
D16  BAT20J  [SOD-323]  20.83,49.4 180 top
D17  YELLOW  [LED-0603]  19.56,39.88 90 top
D18  [SOD-323]  41.78,39.88 90 top
D19  RED  [LED-0603]  24.64,39.88 90 top
D20  GREEN  [LED-0603]  24.64,52.58 270 top
D21  BAT20J  [SOD-323]  80.52,49.4 180 top
D22  YELLOW  [LED-0603]  79.25,39.88 90 top
D23  [SOD-323]  101.47,39.88 90 top
D24  RED  [LED-0603]  84.33,39.88 90 top
D25  GREEN  [LED-0603]  84.33,52.58 270 top
D26  BAT20J  [SOD-323]  140.21,49.4 180 top
D27  YELLOW  [LED-0603]  138.94,39.88 90 top
D28  [SOD-323]  161.16,39.88 90 top
D29  RED  [LED-0603]  144.02,39.88 90 top
D30  GREEN  [LED-0603]  144.02,52.58 270 top
D31  BAT20J  [SOD-323]  20.83,75.82 180 top
D32  YELLOW  [LED-0603]  19.56,66.29 90 top
D33  [SOD-323]  41.78,66.29 90 top
D34  RED  [LED-0603]  24.64,66.29 90 top
D35  GREEN  [LED-0603]  24.64,78.99 270 top
D36  BAT20J  [SOD-323]  80.52,75.82 180 top
D37  YELLOW  [LED-0603]  79.25,66.29 90 top
D38  [SOD-323]  101.47,66.29 90 top
D39  RED  [LED-0603]  84.33,66.29 90 top
D40  GREEN  [LED-0603]  84.33,78.99 270 top
D41  BAT20J  [SOD-323]  140.21,75.82 180 top
D42  YELLOW  [LED-0603]  138.94,66.29 90 top
D43  [SOD-323]  161.16,66.29 90 top
D44  RED  [LED-0603]  144.02,66.29 90 top
D45  GREEN  [LED-0603]  144.02,78.99 270 top
D46  BAT20J  [SOD-323]  20.83,102.23 180 top
D47  YELLOW  [LED-0603]  19.56,92.71 90 top
D48  [SOD-323]  41.78,92.71 90 top
D49  RED  [LED-0603]  24.64,92.71 90 top
D50  GREEN  [LED-0603]  24.64,105.41 270 top
D51  BAT20J  [SOD-323]  80.52,102.23 180 top
D52  YELLOW  [LED-0603]  79.25,92.71 90 top
D53  [SOD-323]  101.47,92.71 90 top
D54  RED  [LED-0603]  84.33,92.71 90 top
D55  GREEN  [LED-0603]  84.33,105.41 270 top
D56  BAT20J  [SOD-323]  140.21,102.23 180 top
D57  YELLOW  [LED-0603]  138.94,92.71 90 top
D58  [SOD-323]  161.16,92.71 90 top
D59  RED  [LED-0603]  144.02,92.71 90 top
D60  GREEN  [LED-0603]  144.02,105.41 270 top
D61  BAT20J  [SOD-323]  20.83,128.65 180 top
D62  YELLOW  [LED-0603]  19.56,119.13 90 top
D63  [SOD-323]  41.78,119.13 90 top
D64  RED  [LED-0603]  24.64,119.13 90 top
D65  GREEN  [LED-0603]  24.64,131.83 270 top
D66  BAT20J  [SOD-323]  80.52,128.65 180 top
D67  YELLOW  [LED-0603]  79.25,119.13 90 top
D68  [SOD-323]  101.47,119.13 90 top
D69  RED  [LED-0603]  84.33,119.13 90 top
D70  GREEN  [LED-0603]  84.33,131.83 270 top
D71  BAT20J  [SOD-323]  140.21,128.65 180 top
D72  YELLOW  [LED-0603]  138.94,119.13 90 top
D73  [SOD-323]  161.16,119.13 90 top
D74  RED  [LED-0603]  144.02,119.13 90 top
D75  GREEN  [LED-0603]  144.02,131.83 270 top
D76  BAT20J  [SOD-323]  20.83,155.07 180 top
D77  YELLOW  [LED-0603]  19.56,145.54 90 top
D78  [SOD-323]  41.78,145.54 90 top
D79  RED  [LED-0603]  24.64,145.54 90 top
D80  GREEN  [LED-0603]  24.64,158.24 270 top
D81  BAT20J  [SOD-323]  80.52,155.07 180 top
D82  YELLOW  [LED-0603]  79.25,145.54 90 top
D83  [SOD-323]  101.47,145.54 90 top
D84  RED  [LED-0603]  84.33,145.54 90 top
D85  GREEN  [LED-0603]  84.33,158.24 270 top
D86  BAT20J  [SOD-323]  140.21,155.07 180 top
D87  YELLOW  [LED-0603]  138.94,145.54 90 top
D88  [SOD-323]  161.16,145.54 90 top
D89  RED  [LED-0603]  144.02,145.54 90 top
D90  GREEN  [LED-0603]  144.02,158.24 270 top
D91  BAT20J  [SOD-323]  20.83,181.48 180 top
D92  YELLOW  [LED-0603]  19.56,171.96 90 top
D93  [SOD-323]  41.78,171.96 90 top
D94  RED  [LED-0603]  24.64,171.96 90 top
D95  GREEN  [LED-0603]  24.64,184.66 270 top
D96  BAT20J  [SOD-323]  80.52,181.48 180 top
D97  YELLOW  [LED-0603]  79.25,171.96 90 top
D98  [SOD-323]  101.47,171.96 90 top
D99  RED  [LED-0603]  84.33,171.96 90 top
D100  GREEN  [LED-0603]  84.33,184.66 270 top
D101  BAT20J  [SOD-323]  140.21,181.48 180 top
D102  YELLOW  [LED-0603]  138.94,171.96 90 top
D103  [SOD-323]  161.16,171.96 90 top
D104  RED  [LED-0603]  144.02,171.96 90 top
D105  GREEN  [LED-0603]  144.02,184.66 270 top
E1  ANTENNATRACE  [TRACE_ANTENNA_2.4GHZ_25.7MM]  58.42,21.74 270 top
E2  ANTENNATRACE  [TRACE_ANTENNA_2.4GHZ_25.7MM]  118.11,21.74 270 top
E3  ANTENNATRACE  [TRACE_ANTENNA_2.4GHZ_25.7MM]  177.8,21.74 270 top
E4  ANTENNATRACE  [TRACE_ANTENNA_2.4GHZ_25.7MM]  58.42,48.16 270 top
E5  ANTENNATRACE  [TRACE_ANTENNA_2.4GHZ_25.7MM]  118.11,48.16 270 top
E6  ANTENNATRACE  [TRACE_ANTENNA_2.4GHZ_25.7MM]  177.8,48.16 270 top
E7  ANTENNATRACE  [TRACE_ANTENNA_2.4GHZ_25.7MM]  58.42,74.57 270 top
E8  ANTENNATRACE  [TRACE_ANTENNA_2.4GHZ_25.7MM]  118.11,74.57 270 top
E9  ANTENNATRACE  [TRACE_ANTENNA_2.4GHZ_25.7MM]  177.8,74.57 270 top
E10  ANTENNATRACE  [TRACE_ANTENNA_2.4GHZ_25.7MM]  58.42,100.99 270 top
E11  ANTENNATRACE  [TRACE_ANTENNA_2.4GHZ_25.7MM]  118.11,100.99 270 top
E12  ANTENNATRACE  [TRACE_ANTENNA_2.4GHZ_25.7MM]  177.8,100.99 270 top
E13  ANTENNATRACE  [TRACE_ANTENNA_2.4GHZ_25.7MM]  58.42,127.41 270 top
E14  ANTENNATRACE  [TRACE_ANTENNA_2.4GHZ_25.7MM]  118.11,127.41 270 top
E15  ANTENNATRACE  [TRACE_ANTENNA_2.4GHZ_25.7MM]  177.8,127.41 270 top
E16  ANTENNATRACE  [TRACE_ANTENNA_2.4GHZ_25.7MM]  58.42,153.82 270 top
E17  ANTENNATRACE  [TRACE_ANTENNA_2.4GHZ_25.7MM]  118.11,153.82 270 top
E18  ANTENNATRACE  [TRACE_ANTENNA_2.4GHZ_25.7MM]  177.8,153.82 270 top
E19  ANTENNATRACE  [TRACE_ANTENNA_2.4GHZ_25.7MM]  58.42,180.24 270 top
E20  ANTENNATRACE  [TRACE_ANTENNA_2.4GHZ_25.7MM]  118.11,180.24 270 top
E21  ANTENNATRACE  [TRACE_ANTENNA_2.4GHZ_25.7MM]  177.8,180.24 270 top
E$1  [FIDUCIAL-1.5X3]  4.57,12.7 0 top
E$5  [FIDUCIAL-1X2]  187.83,13.21 0 top
E$6  [FIDUCIAL-1X2]  187.83,184.91 180 top
FID1  FIDUCIAL1X2  [FIDUCIAL-1X2]  51.82,31.88 0 top
FID2  FIDUCIAL1X2  [FIDUCIAL-1X2]  11.94,8.38 0 top
FID3  FIDUCIAL1X2  [FIDUCIAL-1X2]  71.63,8.38 0 top
FID4  FIDUCIAL1X2  [FIDUCIAL-1X2]  111.51,31.88 0 top
FID5  FIDUCIAL1X2  [FIDUCIAL-1X2]  131.32,8.38 0 top
FID6  FIDUCIAL1X2  [FIDUCIAL-1X2]  171.2,31.88 0 top
FID7  FIDUCIAL1X2  [FIDUCIAL-1X2]  11.94,34.8 0 top
FID8  FIDUCIAL1X2  [FIDUCIAL-1X2]  51.82,58.29 0 top
FID9  FIDUCIAL1X2  [FIDUCIAL-1X2]  71.63,34.8 0 top
FID10  FIDUCIAL1X2  [FIDUCIAL-1X2]  111.51,58.29 0 top
FID11  FIDUCIAL1X2  [FIDUCIAL-1X2]  131.32,34.8 0 top
FID12  FIDUCIAL1X2  [FIDUCIAL-1X2]  171.2,58.29 0 top
FID13  FIDUCIAL1X2  [FIDUCIAL-1X2]  11.94,61.21 0 top
FID14  FIDUCIAL1X2  [FIDUCIAL-1X2]  51.82,84.71 0 top
FID15  FIDUCIAL1X2  [FIDUCIAL-1X2]  71.63,61.21 0 top
FID16  FIDUCIAL1X2  [FIDUCIAL-1X2]  111.51,84.71 0 top
FID17  FIDUCIAL1X2  [FIDUCIAL-1X2]  131.32,61.21 0 top
FID18  FIDUCIAL1X2  [FIDUCIAL-1X2]  171.2,84.71 0 top
FID19  FIDUCIAL1X2  [FIDUCIAL-1X2]  11.94,87.63 0 top
FID20  FIDUCIAL1X2  [FIDUCIAL-1X2]  51.82,111.12 0 top
FID21  FIDUCIAL1X2  [FIDUCIAL-1X2]  71.63,87.63 0 top
FID22  FIDUCIAL1X2  [FIDUCIAL-1X2]  111.51,111.12 0 top
FID23  FIDUCIAL1X2  [FIDUCIAL-1X2]  131.32,87.63 0 top
FID24  FIDUCIAL1X2  [FIDUCIAL-1X2]  171.2,111.12 0 top
FID25  FIDUCIAL1X2  [FIDUCIAL-1X2]  11.94,114.05 0 top
FID26  FIDUCIAL1X2  [FIDUCIAL-1X2]  51.82,137.54 0 top
FID27  FIDUCIAL1X2  [FIDUCIAL-1X2]  71.63,114.05 0 top
FID28  FIDUCIAL1X2  [FIDUCIAL-1X2]  111.51,137.54 0 top
FID29  FIDUCIAL1X2  [FIDUCIAL-1X2]  131.32,114.05 0 top
FID30  FIDUCIAL1X2  [FIDUCIAL-1X2]  171.2,137.54 0 top
FID31  FIDUCIAL1X2  [FIDUCIAL-1X2]  11.94,140.46 0 top
FID32  FIDUCIAL1X2  [FIDUCIAL-1X2]  51.82,163.96 0 top
FID33  FIDUCIAL1X2  [FIDUCIAL-1X2]  71.63,140.46 0 top
FID34  FIDUCIAL1X2  [FIDUCIAL-1X2]  111.51,163.96 0 top
FID35  FIDUCIAL1X2  [FIDUCIAL-1X2]  131.32,140.46 0 top
FID36  FIDUCIAL1X2  [FIDUCIAL-1X2]  171.2,163.96 0 top
FID37  FIDUCIAL1X2  [FIDUCIAL-1X2]  11.94,166.88 0 top
FID38  FIDUCIAL1X2  [FIDUCIAL-1X2]  51.82,190.37 0 top
FID39  FIDUCIAL1X2  [FIDUCIAL-1X2]  71.63,166.88 0 top
FID40  FIDUCIAL1X2  [FIDUCIAL-1X2]  111.51,190.37 0 top
FID41  FIDUCIAL1X2  [FIDUCIAL-1X2]  131.32,166.88 0 top
FID42  FIDUCIAL1X2  [FIDUCIAL-1X2]  171.2,190.37 0 top
J1  DNP  [U.FL]  56.03,14.67 90 top
J2  DNP  [U.FL]  115.72,14.67 90 top
J3  DNP  [U.FL]  175.41,14.67 90 top
J4  DNP  [U.FL]  56.03,41.08 90 top
J5  DNP  [U.FL]  115.72,41.08 90 top
J6  DNP  [U.FL]  175.41,41.08 90 top
J7  DNP  [U.FL]  56.03,67.5 90 top
J8  DNP  [U.FL]  115.72,67.5 90 top
J9  DNP  [U.FL]  175.41,67.5 90 top
J10  DNP  [U.FL]  56.03,93.92 90 top
J11  DNP  [U.FL]  115.72,93.92 90 top
J12  DNP  [U.FL]  175.41,93.92 90 top
J13  DNP  [U.FL]  56.03,120.33 90 top
J14  DNP  [U.FL]  115.72,120.33 90 top
J15  DNP  [U.FL]  175.41,120.33 90 top
J16  DNP  [U.FL]  56.03,146.75 90 top
J17  DNP  [U.FL]  115.72,146.75 90 top
J18  DNP  [U.FL]  175.41,146.75 90 top
J19  DNP  [U.FL]  56.03,173.16 90 top
J20  DNP  [U.FL]  115.72,173.16 90 top
J21  DNP  [U.FL]  175.41,173.16 90 top
JP1  USB  [USB-B-MICRO-SMD_V03]  12.89,14.73 0 top
JP2  LiPo  [JST-2-PTH]  17.02,23.62 90 top
JP3  M10"  [1X10]  27.18,31.24 180 bottom
JP4  FTDI_BASICPTH  [FTDI_BASIC]  37.34,8.38 180 bottom
JP5  I2C  [1X04]  27.18,8.38 180 bottom
JP6  FTDI_BASICPTH  [FTDI_BASIC]  97.03,8.38 180 bottom
JP7  I2C  [1X04]  86.87,8.38 180 bottom
JP8  USB  [USB-B-MICRO-SMD_V03]  72.58,14.73 0 top
JP9  LiPo  [JST-2-PTH]  76.71,23.62 90 top
JP10  M10"  [1X10]  86.87,31.24 180 bottom
JP11  FTDI_BASICPTH  [FTDI_BASIC]  156.72,8.38 180 bottom
JP12  I2C  [1X04]  146.56,8.38 180 bottom
JP13  USB  [USB-B-MICRO-SMD_V03]  132.27,14.73 0 top
JP14  LiPo  [JST-2-PTH]  136.4,23.62 90 top
JP15  M10"  [1X10]  146.56,31.24 180 bottom
JP16  FTDI_BASICPTH  [FTDI_BASIC]  37.34,34.8 180 bottom
JP17  I2C  [1X04]  27.18,34.8 180 bottom
JP18  USB  [USB-B-MICRO-SMD_V03]  12.89,41.15 0 top
JP19  LiPo  [JST-2-PTH]  17.02,50.04 90 top
JP20  M10"  [1X10]  27.18,57.66 180 bottom
JP21  FTDI_BASICPTH  [FTDI_BASIC]  97.03,34.8 180 bottom
JP22  I2C  [1X04]  86.87,34.8 180 bottom
JP23  USB  [USB-B-MICRO-SMD_V03]  72.58,41.15 0 top
JP24  LiPo  [JST-2-PTH]  76.71,50.04 90 top
JP25  M10"  [1X10]  86.87,57.66 180 bottom
JP26  FTDI_BASICPTH  [FTDI_BASIC]  156.72,34.8 180 bottom
JP27  I2C  [1X04]  146.56,34.8 180 bottom
JP28  USB  [USB-B-MICRO-SMD_V03]  132.27,41.15 0 top
JP29  LiPo  [JST-2-PTH]  136.4,50.04 90 top
JP30  M10"  [1X10]  146.56,57.66 180 bottom
JP31  FTDI_BASICPTH  [FTDI_BASIC]  37.34,61.21 180 bottom
JP32  I2C  [1X04]  27.18,61.21 180 bottom
JP33  USB  [USB-B-MICRO-SMD_V03]  12.89,67.56 0 top
JP34  LiPo  [JST-2-PTH]  17.02,76.45 90 top
JP35  M10"  [1X10]  27.18,84.07 180 bottom
JP36  FTDI_BASICPTH  [FTDI_BASIC]  97.03,61.21 180 bottom
JP37  I2C  [1X04]  86.87,61.21 180 bottom
JP38  USB  [USB-B-MICRO-SMD_V03]  72.58,67.56 0 top
JP39  LiPo  [JST-2-PTH]  76.71,76.45 90 top
JP40  M10"  [1X10]  86.87,84.07 180 bottom
JP41  FTDI_BASICPTH  [FTDI_BASIC]  156.72,61.21 180 bottom
JP42  I2C  [1X04]  146.56,61.21 180 bottom
JP43  USB  [USB-B-MICRO-SMD_V03]  132.27,67.56 0 top
JP44  LiPo  [JST-2-PTH]  136.4,76.45 90 top
JP45  M10"  [1X10]  146.56,84.07 180 bottom
JP46  FTDI_BASICPTH  [FTDI_BASIC]  37.34,87.63 180 bottom
JP47  I2C  [1X04]  27.18,87.63 180 bottom
JP48  USB  [USB-B-MICRO-SMD_V03]  12.89,93.98 0 top
JP49  LiPo  [JST-2-PTH]  17.02,102.87 90 top
JP50  M10"  [1X10]  27.18,110.49 180 bottom
JP51  FTDI_BASICPTH  [FTDI_BASIC]  97.03,87.63 180 bottom
JP52  I2C  [1X04]  86.87,87.63 180 bottom
JP53  USB  [USB-B-MICRO-SMD_V03]  72.58,93.98 0 top
JP54  LiPo  [JST-2-PTH]  76.71,102.87 90 top
JP55  M10"  [1X10]  86.87,110.49 180 bottom
JP56  FTDI_BASICPTH  [FTDI_BASIC]  156.72,87.63 180 bottom
JP57  I2C  [1X04]  146.56,87.63 180 bottom
JP58  USB  [USB-B-MICRO-SMD_V03]  132.27,93.98 0 top
JP59  LiPo  [JST-2-PTH]  136.4,102.87 90 top
JP60  M10"  [1X10]  146.56,110.49 180 bottom
JP61  FTDI_BASICPTH  [FTDI_BASIC]  37.34,114.05 180 bottom
JP62  I2C  [1X04]  27.18,114.05 180 bottom
JP63  USB  [USB-B-MICRO-SMD_V03]  12.89,120.4 0 top
JP64  LiPo  [JST-2-PTH]  17.02,129.29 90 top
JP65  M10"  [1X10]  27.18,136.91 180 bottom
JP66  FTDI_BASICPTH  [FTDI_BASIC]  97.03,114.05 180 bottom
JP67  I2C  [1X04]  86.87,114.05 180 bottom
JP68  USB  [USB-B-MICRO-SMD_V03]  72.58,120.4 0 top
JP69  LiPo  [JST-2-PTH]  76.71,129.29 90 top
JP70  M10"  [1X10]  86.87,136.91 180 bottom
JP71  FTDI_BASICPTH  [FTDI_BASIC]  156.72,114.05 180 bottom
JP72  I2C  [1X04]  146.56,114.05 180 bottom
JP73  USB  [USB-B-MICRO-SMD_V03]  132.27,120.4 0 top
JP74  LiPo  [JST-2-PTH]  136.4,129.29 90 top
JP75  M10"  [1X10]  146.56,136.91 180 bottom
JP76  FTDI_BASICPTH  [FTDI_BASIC]  37.34,140.46 180 bottom
JP77  I2C  [1X04]  27.18,140.46 180 bottom
JP78  USB  [USB-B-MICRO-SMD_V03]  12.89,146.81 0 top
JP79  LiPo  [JST-2-PTH]  17.02,155.7 90 top
JP80  M10"  [1X10]  27.18,163.32 180 bottom
JP81  FTDI_BASICPTH  [FTDI_BASIC]  97.03,140.46 180 bottom
JP82  I2C  [1X04]  86.87,140.46 180 bottom
JP83  USB  [USB-B-MICRO-SMD_V03]  72.58,146.81 0 top
JP84  LiPo  [JST-2-PTH]  76.71,155.7 90 top
JP85  M10"  [1X10]  86.87,163.32 180 bottom
JP86  FTDI_BASICPTH  [FTDI_BASIC]  156.72,140.46 180 bottom
JP87  I2C  [1X04]  146.56,140.46 180 bottom
JP88  USB  [USB-B-MICRO-SMD_V03]  132.27,146.81 0 top
JP89  LiPo  [JST-2-PTH]  136.4,155.7 90 top
JP90  M10"  [1X10]  146.56,163.32 180 bottom
JP91  FTDI_BASICPTH  [FTDI_BASIC]  37.34,166.88 180 bottom
JP92  I2C  [1X04]  27.18,166.88 180 bottom
JP93  USB  [USB-B-MICRO-SMD_V03]  12.89,173.23 0 top
JP94  LiPo  [JST-2-PTH]  17.02,182.12 90 top
JP95  M10"  [1X10]  27.18,189.74 180 bottom
JP96  FTDI_BASICPTH  [FTDI_BASIC]  97.03,166.88 180 bottom
JP97  I2C  [1X04]  86.87,166.88 180 bottom
JP98  USB  [USB-B-MICRO-SMD_V03]  72.58,173.23 0 top
JP99  LiPo  [JST-2-PTH]  76.71,182.12 90 top
JP100  M10"  [1X10]  86.87,189.74 180 bottom
JP101  FTDI_BASICPTH  [FTDI_BASIC]  156.72,166.88 180 bottom
JP102  I2C  [1X04]  146.56,166.88 180 bottom
JP103  USB  [USB-B-MICRO-SMD_V03]  132.27,173.23 0 top
JP104  LiPo  [JST-2-PTH]  136.4,182.12 90 top
JP105  M10"  [1X10]  146.56,189.74 180 bottom
L1  DNP  [0603]  50.04,20.89 270 top
L2  DNP  [0603]  54.61,20.89 270 top
L3  DNP  [0603]  109.73,20.89 270 top
L4  DNP  [0603]  114.3,20.89 270 top
L5  DNP  [0603]  169.42,20.89 270 top
L6  DNP  [0603]  173.99,20.89 270 top
L7  DNP  [0603]  50.04,47.31 270 top
L8  DNP  [0603]  54.61,47.31 270 top
L9  DNP  [0603]  109.73,47.31 270 top
L10  DNP  [0603]  114.3,47.31 270 top
L11  DNP  [0603]  169.42,47.31 270 top
L12  DNP  [0603]  173.99,47.31 270 top
L13  DNP  [0603]  50.04,73.72 270 top
L14  DNP  [0603]  54.61,73.72 270 top
L15  DNP  [0603]  109.73,73.72 270 top
L16  DNP  [0603]  114.3,73.72 270 top
L17  DNP  [0603]  169.42,73.72 270 top
L18  DNP  [0603]  173.99,73.72 270 top
L19  DNP  [0603]  50.04,100.14 270 top
L20  DNP  [0603]  54.61,100.14 270 top
L21  DNP  [0603]  109.73,100.14 270 top
L22  DNP  [0603]  114.3,100.14 270 top
L23  DNP  [0603]  169.42,100.14 270 top
L24  DNP  [0603]  173.99,100.14 270 top
L25  DNP  [0603]  50.04,126.56 270 top
L26  DNP  [0603]  54.61,126.56 270 top
L27  DNP  [0603]  109.73,126.56 270 top
L28  DNP  [0603]  114.3,126.56 270 top
L29  DNP  [0603]  169.42,126.56 270 top
L30  DNP  [0603]  173.99,126.56 270 top
L31  DNP  [0603]  50.04,152.97 270 top
L32  DNP  [0603]  54.61,152.97 270 top
L33  DNP  [0603]  109.73,152.97 270 top
L34  DNP  [0603]  114.3,152.97 270 top
L35  DNP  [0603]  169.42,152.97 270 top
L36  DNP  [0603]  173.99,152.97 270 top
L37  DNP  [0603]  50.04,179.39 270 top
L38  DNP  [0603]  54.61,179.39 270 top
L39  DNP  [0603]  109.73,179.39 270 top
L40  DNP  [0603]  114.3,179.39 270 top
L41  DNP  [0603]  169.42,179.39 270 top
L42  DNP  [0603]  173.99,179.39 270 top
LOGO1  SFE_LOGO_NAME.2_INCH  [SFE_LOGO_NAME_.2]  59.94,8.76 90 bottom
LOGO2  SFE_LOGO_NAME.2_INCH  [SFE_LOGO_NAME_.2]  119.63,8.76 90 bottom
LOGO3  SFE_LOGO_FLAME.1_INCH  [SFE_LOGO_FLAME_.1]  13.5,7.36 0 top
LOGO4  OSHW-LOGOS  [OSHW-LOGO-S]  18.29,9.02 0 top
LOGO5  SFE_LOGO_NAME.2_INCH  [SFE_LOGO_NAME_.2]  64.01,8.76 90 top
LOGO6  SFE_LOGO_FLAME.1_INCH  [SFE_LOGO_FLAME_.1]  73.19,7.36 0 top
LOGO7  OSHW-LOGOS  [OSHW-LOGO-S]  77.98,9.02 0 top
LOGO8  SFE_LOGO_NAME.2_INCH  [SFE_LOGO_NAME_.2]  123.7,8.76 90 top
LOGO9  SFE_LOGO_NAME.2_INCH  [SFE_LOGO_NAME_.2]  179.32,8.76 90 bottom
LOGO10  SFE_LOGO_FLAME.1_INCH  [SFE_LOGO_FLAME_.1]  132.88,7.36 0 top
LOGO11  OSHW-LOGOS  [OSHW-LOGO-S]  137.67,9.02 0 top
LOGO12  SFE_LOGO_NAME.2_INCH  [SFE_LOGO_NAME_.2]  183.39,8.76 90 top
LOGO13  SFE_LOGO_NAME.2_INCH  [SFE_LOGO_NAME_.2]  59.94,35.18 90 bottom
LOGO14  SFE_LOGO_FLAME.1_INCH  [SFE_LOGO_FLAME_.1]  13.5,33.78 0 top
LOGO15  OSHW-LOGOS  [OSHW-LOGO-S]  18.29,35.43 0 top
LOGO16  SFE_LOGO_NAME.2_INCH  [SFE_LOGO_NAME_.2]  64.01,35.18 90 top
LOGO17  SFE_LOGO_NAME.2_INCH  [SFE_LOGO_NAME_.2]  119.63,35.18 90 bottom
LOGO18  SFE_LOGO_FLAME.1_INCH  [SFE_LOGO_FLAME_.1]  73.19,33.78 0 top
LOGO19  OSHW-LOGOS  [OSHW-LOGO-S]  77.98,35.43 0 top
LOGO20  SFE_LOGO_NAME.2_INCH  [SFE_LOGO_NAME_.2]  123.7,35.18 90 top
LOGO21  SFE_LOGO_NAME.2_INCH  [SFE_LOGO_NAME_.2]  179.32,35.18 90 bottom
LOGO22  SFE_LOGO_FLAME.1_INCH  [SFE_LOGO_FLAME_.1]  132.88,33.78 0 top
LOGO23  OSHW-LOGOS  [OSHW-LOGO-S]  137.67,35.43 0 top
LOGO24  SFE_LOGO_NAME.2_INCH  [SFE_LOGO_NAME_.2]  183.39,35.18 90 top
LOGO25  SFE_LOGO_NAME.2_INCH  [SFE_LOGO_NAME_.2]  59.94,61.59 90 bottom
LOGO26  SFE_LOGO_FLAME.1_INCH  [SFE_LOGO_FLAME_.1]  13.5,60.19 0 top
LOGO27  OSHW-LOGOS  [OSHW-LOGO-S]  18.29,61.85 0 top
LOGO28  SFE_LOGO_NAME.2_INCH  [SFE_LOGO_NAME_.2]  64.01,61.59 90 top
LOGO29  SFE_LOGO_NAME.2_INCH  [SFE_LOGO_NAME_.2]  119.63,61.59 90 bottom
LOGO30  SFE_LOGO_FLAME.1_INCH  [SFE_LOGO_FLAME_.1]  73.19,60.19 0 top
LOGO31  OSHW-LOGOS  [OSHW-LOGO-S]  77.98,61.85 0 top
LOGO32  SFE_LOGO_NAME.2_INCH  [SFE_LOGO_NAME_.2]  123.7,61.59 90 top
LOGO33  SFE_LOGO_NAME.2_INCH  [SFE_LOGO_NAME_.2]  179.32,61.59 90 bottom
LOGO34  SFE_LOGO_FLAME.1_INCH  [SFE_LOGO_FLAME_.1]  132.88,60.19 0 top
LOGO35  OSHW-LOGOS  [OSHW-LOGO-S]  137.67,61.85 0 top
LOGO36  SFE_LOGO_NAME.2_INCH  [SFE_LOGO_NAME_.2]  183.39,61.59 90 top
LOGO37  SFE_LOGO_NAME.2_INCH  [SFE_LOGO_NAME_.2]  59.94,88.01 90 bottom
LOGO38  SFE_LOGO_FLAME.1_INCH  [SFE_LOGO_FLAME_.1]  13.5,86.61 0 top
LOGO39  OSHW-LOGOS  [OSHW-LOGO-S]  18.29,88.27 0 top
LOGO40  SFE_LOGO_NAME.2_INCH  [SFE_LOGO_NAME_.2]  64.01,88.01 90 top
LOGO41  SFE_LOGO_NAME.2_INCH  [SFE_LOGO_NAME_.2]  119.63,88.01 90 bottom
LOGO42  SFE_LOGO_FLAME.1_INCH  [SFE_LOGO_FLAME_.1]  73.19,86.61 0 top
LOGO43  OSHW-LOGOS  [OSHW-LOGO-S]  77.98,88.27 0 top
LOGO44  SFE_LOGO_NAME.2_INCH  [SFE_LOGO_NAME_.2]  123.7,88.01 90 top
LOGO45  SFE_LOGO_NAME.2_INCH  [SFE_LOGO_NAME_.2]  179.32,88.01 90 bottom
LOGO46  SFE_LOGO_FLAME.1_INCH  [SFE_LOGO_FLAME_.1]  132.88,86.61 0 top
LOGO47  OSHW-LOGOS  [OSHW-LOGO-S]  137.67,88.27 0 top
LOGO48  SFE_LOGO_NAME.2_INCH  [SFE_LOGO_NAME_.2]  183.39,88.01 90 top
LOGO49  SFE_LOGO_NAME.2_INCH  [SFE_LOGO_NAME_.2]  59.94,114.43 90 bottom
LOGO50  SFE_LOGO_FLAME.1_INCH  [SFE_LOGO_FLAME_.1]  13.5,113.03 0 top
LOGO51  OSHW-LOGOS  [OSHW-LOGO-S]  18.29,114.68 0 top
LOGO52  SFE_LOGO_NAME.2_INCH  [SFE_LOGO_NAME_.2]  64.01,114.43 90 top
LOGO53  SFE_LOGO_NAME.2_INCH  [SFE_LOGO_NAME_.2]  119.63,114.43 90 bottom
LOGO54  SFE_LOGO_FLAME.1_INCH  [SFE_LOGO_FLAME_.1]  73.19,113.03 0 top
LOGO55  OSHW-LOGOS  [OSHW-LOGO-S]  77.98,114.68 0 top
LOGO56  SFE_LOGO_NAME.2_INCH  [SFE_LOGO_NAME_.2]  123.7,114.43 90 top
LOGO57  SFE_LOGO_NAME.2_INCH  [SFE_LOGO_NAME_.2]  179.32,114.43 90 bottom
LOGO58  SFE_LOGO_FLAME.1_INCH  [SFE_LOGO_FLAME_.1]  132.88,113.03 0 top
LOGO59  OSHW-LOGOS  [OSHW-LOGO-S]  137.67,114.68 0 top
LOGO60  SFE_LOGO_NAME.2_INCH  [SFE_LOGO_NAME_.2]  183.39,114.43 90 top
LOGO61  SFE_LOGO_NAME.2_INCH  [SFE_LOGO_NAME_.2]  59.94,140.84 90 bottom
LOGO62  SFE_LOGO_FLAME.1_INCH  [SFE_LOGO_FLAME_.1]  13.5,139.44 0 top
LOGO63  OSHW-LOGOS  [OSHW-LOGO-S]  18.29,141.1 0 top
LOGO64  SFE_LOGO_NAME.2_INCH  [SFE_LOGO_NAME_.2]  64.01,140.84 90 top
LOGO65  SFE_LOGO_NAME.2_INCH  [SFE_LOGO_NAME_.2]  119.63,140.84 90 bottom
LOGO66  SFE_LOGO_FLAME.1_INCH  [SFE_LOGO_FLAME_.1]  73.19,139.44 0 top
LOGO67  OSHW-LOGOS  [OSHW-LOGO-S]  77.98,141.1 0 top
LOGO68  SFE_LOGO_NAME.2_INCH  [SFE_LOGO_NAME_.2]  123.7,140.84 90 top
LOGO69  SFE_LOGO_NAME.2_INCH  [SFE_LOGO_NAME_.2]  179.32,140.84 90 bottom
LOGO70  SFE_LOGO_FLAME.1_INCH  [SFE_LOGO_FLAME_.1]  132.88,139.44 0 top
LOGO71  OSHW-LOGOS  [OSHW-LOGO-S]  137.67,141.1 0 top
LOGO72  SFE_LOGO_NAME.2_INCH  [SFE_LOGO_NAME_.2]  183.39,140.84 90 top
LOGO73  SFE_LOGO_NAME.2_INCH  [SFE_LOGO_NAME_.2]  59.94,167.26 90 bottom
LOGO74  SFE_LOGO_FLAME.1_INCH  [SFE_LOGO_FLAME_.1]  13.5,165.86 0 top
LOGO75  OSHW-LOGOS  [OSHW-LOGO-S]  18.29,167.51 0 top
LOGO76  SFE_LOGO_NAME.2_INCH  [SFE_LOGO_NAME_.2]  64.01,167.26 90 top
LOGO77  SFE_LOGO_NAME.2_INCH  [SFE_LOGO_NAME_.2]  119.63,167.26 90 bottom
LOGO78  SFE_LOGO_FLAME.1_INCH  [SFE_LOGO_FLAME_.1]  73.19,165.86 0 top
LOGO79  OSHW-LOGOS  [OSHW-LOGO-S]  77.98,167.51 0 top
LOGO80  SFE_LOGO_NAME.2_INCH  [SFE_LOGO_NAME_.2]  123.7,167.26 90 top
LOGO81  SFE_LOGO_NAME.2_INCH  [SFE_LOGO_NAME_.2]  179.32,167.26 90 bottom
LOGO82  SFE_LOGO_FLAME.1_INCH  [SFE_LOGO_FLAME_.1]  132.88,165.86 0 top
LOGO83  OSHW-LOGOS  [OSHW-LOGO-S]  137.67,167.51 0 top
LOGO84  SFE_LOGO_NAME.2_INCH  [SFE_LOGO_NAME_.2]  183.39,167.26 90 top
Q1  2.5A/30V  [SOT23-3]  20.83,25.53 0 top
Q2  2.5A/30V  [SOT23-3]  80.52,25.53 0 top
Q3  2.5A/30V  [SOT23-3]  140.21,25.53 0 top
Q4  2.5A/30V  [SOT23-3]  20.83,51.94 0 top
Q5  2.5A/30V  [SOT23-3]  80.52,51.94 0 top
Q6  2.5A/30V  [SOT23-3]  140.21,51.94 0 top
Q7  2.5A/30V  [SOT23-3]  20.83,78.36 0 top
Q8  2.5A/30V  [SOT23-3]  80.52,78.36 0 top
Q9  2.5A/30V  [SOT23-3]  140.21,78.36 0 top
Q10  2.5A/30V  [SOT23-3]  20.83,104.78 0 top
Q11  2.5A/30V  [SOT23-3]  80.52,104.78 0 top
Q12  2.5A/30V  [SOT23-3]  140.21,104.78 0 top
Q13  2.5A/30V  [SOT23-3]  20.83,131.19 0 top
Q14  2.5A/30V  [SOT23-3]  80.52,131.19 0 top
Q15  2.5A/30V  [SOT23-3]  140.21,131.19 0 top
Q16  2.5A/30V  [SOT23-3]  20.83,157.61 0 top
Q17  2.5A/30V  [SOT23-3]  80.52,157.61 0 top
Q18  2.5A/30V  [SOT23-3]  140.21,157.61 0 top
Q19  2.5A/30V  [SOT23-3]  20.83,184.02 0 top
Q20  2.5A/30V  [SOT23-3]  80.52,184.02 0 top
Q21  2.5A/30V  [SOT23-3]  140.21,184.02 0 top
R1  12k  [0603-RES]  47.5,17.27 90 top
R2  200  [0603-RES]  19.56,14.73 180 top
R3  10K  [0603-RES]  51.31,25.53 270 top
R4  2.0k  [0603-RES]  19.56,16 180 top
R5  200  [0603-RES]  38.61,23.62 0 top
R6  10K  [0603-RES]  50.04,14.73 270 top
R7  10K  [0603-RES]  20.83,21.08 180 top
R8  200  [0603-RES]  24.64,24.89 180 top
R9  0  [0603]  56.9,21.74 180 top
R10  DNP  [0603-RES]  56.03,20.89 90 top
R11  2.2k  [0603-RES]  36.07,14.73 90 top
R12  10K  [0603-RES]  109.73,14.73 270 top
R13  2.2k  [0603-RES]  37.34,14.73 90 top
R14  10K  [0603-RES]  111,25.53 270 top
R15  1K  [0603-RES]  38.61,13.46 270 top
R16  200  [0603-RES]  24.64,14.73 0 top
R17  10K  [0603-RES]  39.24,27.43 0 top
R18  1K  [0603-RES]  98.3,13.46 270 top
R19  2.2k  [0603-RES]  97.03,14.73 90 top
R20  2.2k  [0603-RES]  95.76,14.73 90 top
R21  10K  [0603-RES]  80.52,21.08 180 top
R22  0  [0603]  116.59,21.74 180 top
R23  DNP  [0603-RES]  115.72,20.89 90 top
R24  12k  [0603-RES]  107.19,17.27 90 top
R25  200  [0603-RES]  84.33,24.89 180 top
R26  200  [0603-RES]  98.3,23.62 0 top
R27  200  [0603-RES]  79.25,14.73 180 top
R28  200  [0603-RES]  84.33,14.73 0 top
R29  10K  [0603-RES]  98.93,27.43 0 top
R30  2.0k  [0603-RES]  79.25,16 180 top
R31  10K  [0603-RES]  169.42,14.73 270 top
R32  10K  [0603-RES]  170.69,25.53 270 top
R33  1K  [0603-RES]  157.99,13.46 270 top
R34  2.2k  [0603-RES]  156.72,14.73 90 top
R35  2.2k  [0603-RES]  155.45,14.73 90 top
R36  10K  [0603-RES]  140.21,21.08 180 top
R37  0  [0603]  176.28,21.74 180 top
R38  DNP  [0603-RES]  175.41,20.89 90 top
R39  12k  [0603-RES]  166.88,17.27 90 top
R40  200  [0603-RES]  144.02,24.89 180 top
R41  200  [0603-RES]  157.99,23.62 0 top
R42  200  [0603-RES]  138.94,14.73 180 top
R43  200  [0603-RES]  144.02,14.73 0 top
R44  10K  [0603-RES]  158.62,27.43 0 top
R45  2.0k  [0603-RES]  138.94,16 180 top
R46  10K  [0603-RES]  50.04,41.15 270 top
R47  10K  [0603-RES]  51.31,51.94 270 top
R48  1K  [0603-RES]  38.61,39.88 270 top
R49  2.2k  [0603-RES]  37.34,41.15 90 top
R50  2.2k  [0603-RES]  36.07,41.15 90 top
R51  10K  [0603-RES]  20.83,47.5 180 top
R52  0  [0603]  56.9,48.16 180 top
R53  DNP  [0603-RES]  56.03,47.31 90 top
R54  12k  [0603-RES]  47.5,43.69 90 top
R55  200  [0603-RES]  24.64,51.31 180 top
R56  200  [0603-RES]  38.61,50.04 0 top
R57  200  [0603-RES]  19.56,41.15 180 top
R58  200  [0603-RES]  24.64,41.15 0 top
R59  10K  [0603-RES]  39.24,53.85 0 top
R60  2.0k  [0603-RES]  19.56,42.42 180 top
R61  10K  [0603-RES]  109.73,41.15 270 top
R62  10K  [0603-RES]  111,51.94 270 top
R63  1K  [0603-RES]  98.3,39.88 270 top
R64  2.2k  [0603-RES]  97.03,41.15 90 top
R65  2.2k  [0603-RES]  95.76,41.15 90 top
R66  10K  [0603-RES]  80.52,47.5 180 top
R67  0  [0603]  116.59,48.16 180 top
R68  DNP  [0603-RES]  115.72,47.31 90 top
R69  12k  [0603-RES]  107.19,43.69 90 top
R70  200  [0603-RES]  84.33,51.31 180 top
R71  200  [0603-RES]  98.3,50.04 0 top
R72  200  [0603-RES]  79.25,41.15 180 top
R73  200  [0603-RES]  84.33,41.15 0 top
R74  10K  [0603-RES]  98.93,53.85 0 top
R75  2.0k  [0603-RES]  79.25,42.42 180 top
R76  10K  [0603-RES]  169.42,41.15 270 top
R77  10K  [0603-RES]  170.69,51.94 270 top
R78  1K  [0603-RES]  157.99,39.88 270 top
R79  2.2k  [0603-RES]  156.72,41.15 90 top
R80  2.2k  [0603-RES]  155.45,41.15 90 top
R81  10K  [0603-RES]  140.21,47.5 180 top
R82  0  [0603]  176.28,48.16 180 top
R83  DNP  [0603-RES]  175.41,47.31 90 top
R84  12k  [0603-RES]  166.88,43.69 90 top
R85  200  [0603-RES]  144.02,51.31 180 top
R86  200  [0603-RES]  157.99,50.04 0 top
R87  200  [0603-RES]  138.94,41.15 180 top
R88  200  [0603-RES]  144.02,41.15 0 top
R89  10K  [0603-RES]  158.62,53.85 0 top
R90  2.0k  [0603-RES]  138.94,42.42 180 top
R91  10K  [0603-RES]  50.04,67.56 270 top
R92  10K  [0603-RES]  51.31,78.36 270 top
R93  1K  [0603-RES]  38.61,66.29 270 top
R94  2.2k  [0603-RES]  37.34,67.56 90 top
R95  2.2k  [0603-RES]  36.07,67.56 90 top
R96  10K  [0603-RES]  20.83,73.91 180 top
R97  0  [0603]  56.9,74.57 180 top
R98  DNP  [0603-RES]  56.03,73.72 90 top
R99  12k  [0603-RES]  47.5,70.1 90 top
R100  200  [0603-RES]  24.64,77.72 180 top
R101  200  [0603-RES]  38.61,76.45 0 top
R102  200  [0603-RES]  19.56,67.56 180 top
R103  200  [0603-RES]  24.64,67.56 0 top
R104  10K  [0603-RES]  39.24,80.26 0 top
R105  2.0k  [0603-RES]  19.56,68.83 180 top
R106  10K  [0603-RES]  109.73,67.56 270 top
R107  10K  [0603-RES]  111,78.36 270 top
R108  1K  [0603-RES]  98.3,66.29 270 top
R109  2.2k  [0603-RES]  97.03,67.56 90 top
R110  2.2k  [0603-RES]  95.76,67.56 90 top
R111  10K  [0603-RES]  80.52,73.91 180 top
R112  0  [0603]  116.59,74.57 180 top
R113  DNP  [0603-RES]  115.72,73.72 90 top
R114  12k  [0603-RES]  107.19,70.1 90 top
R115  200  [0603-RES]  84.33,77.72 180 top
R116  200  [0603-RES]  98.3,76.45 0 top
R117  200  [0603-RES]  79.25,67.56 180 top
R118  200  [0603-RES]  84.33,67.56 0 top
R119  10K  [0603-RES]  98.93,80.26 0 top
R120  2.0k  [0603-RES]  79.25,68.83 180 top
R121  10K  [0603-RES]  169.42,67.56 270 top
R122  10K  [0603-RES]  170.69,78.36 270 top
R123  1K  [0603-RES]  157.99,66.29 270 top
R124  2.2k  [0603-RES]  156.72,67.56 90 top
R125  2.2k  [0603-RES]  155.45,67.56 90 top
R126  10K  [0603-RES]  140.21,73.91 180 top
R127  0  [0603]  176.28,74.57 180 top
R128  DNP  [0603-RES]  175.41,73.72 90 top
R129  12k  [0603-RES]  166.88,70.1 90 top
R130  200  [0603-RES]  144.02,77.72 180 top
R131  200  [0603-RES]  157.99,76.45 0 top
R132  200  [0603-RES]  138.94,67.56 180 top
R133  200  [0603-RES]  144.02,67.56 0 top
R134  10K  [0603-RES]  158.62,80.26 0 top
R135  2.0k  [0603-RES]  138.94,68.83 180 top
R136  10K  [0603-RES]  50.04,93.98 270 top
R137  10K  [0603-RES]  51.31,104.78 270 top
R138  1K  [0603-RES]  38.61,92.71 270 top
R139  2.2k  [0603-RES]  37.34,93.98 90 top
R140  2.2k  [0603-RES]  36.07,93.98 90 top
R141  10K  [0603-RES]  20.83,100.33 180 top
R142  0  [0603]  56.9,100.99 180 top
R143  DNP  [0603-RES]  56.03,100.14 90 top
R144  12k  [0603-RES]  47.5,96.52 90 top
R145  200  [0603-RES]  24.64,104.14 180 top
R146  200  [0603-RES]  38.61,102.87 0 top
R147  200  [0603-RES]  19.56,93.98 180 top
R148  200  [0603-RES]  24.64,93.98 0 top
R149  10K  [0603-RES]  39.24,106.68 0 top
R150  2.0k  [0603-RES]  19.56,95.25 180 top
R151  10K  [0603-RES]  109.73,93.98 270 top
R152  10K  [0603-RES]  111,104.78 270 top
R153  1K  [0603-RES]  98.3,92.71 270 top
R154  2.2k  [0603-RES]  97.03,93.98 90 top
R155  2.2k  [0603-RES]  95.76,93.98 90 top
R156  10K  [0603-RES]  80.52,100.33 180 top
R157  0  [0603]  116.59,100.99 180 top
R158  DNP  [0603-RES]  115.72,100.14 90 top
R159  12k  [0603-RES]  107.19,96.52 90 top
R160  200  [0603-RES]  84.33,104.14 180 top
R161  200  [0603-RES]  98.3,102.87 0 top
R162  200  [0603-RES]  79.25,93.98 180 top
R163  200  [0603-RES]  84.33,93.98 0 top
R164  10K  [0603-RES]  98.93,106.68 0 top
R165  2.0k  [0603-RES]  79.25,95.25 180 top
R166  10K  [0603-RES]  169.42,93.98 270 top
R167  10K  [0603-RES]  170.69,104.78 270 top
R168  1K  [0603-RES]  157.99,92.71 270 top
R169  2.2k  [0603-RES]  156.72,93.98 90 top
R170  2.2k  [0603-RES]  155.45,93.98 90 top
R171  10K  [0603-RES]  140.21,100.33 180 top
R172  0  [0603]  176.28,100.99 180 top
R173  DNP  [0603-RES]  175.41,100.14 90 top
R174  12k  [0603-RES]  166.88,96.52 90 top
R175  200  [0603-RES]  144.02,104.14 180 top
R176  200  [0603-RES]  157.99,102.87 0 top
R177  200  [0603-RES]  138.94,93.98 180 top
R178  200  [0603-RES]  144.02,93.98 0 top
R179  10K  [0603-RES]  158.62,106.68 0 top
R180  2.0k  [0603-RES]  138.94,95.25 180 top
R181  10K  [0603-RES]  50.04,120.4 270 top
R182  10K  [0603-RES]  51.31,131.19 270 top
R183  1K  [0603-RES]  38.61,119.13 270 top
R184  2.2k  [0603-RES]  37.34,120.4 90 top
R185  2.2k  [0603-RES]  36.07,120.4 90 top
R186  10K  [0603-RES]  20.83,126.75 180 top
R187  0  [0603]  56.9,127.41 180 top
R188  DNP  [0603-RES]  56.03,126.56 90 top
R189  12k  [0603-RES]  47.5,122.94 90 top
R190  200  [0603-RES]  24.64,130.56 180 top
R191  200  [0603-RES]  38.61,129.29 0 top
R192  200  [0603-RES]  19.56,120.4 180 top
R193  200  [0603-RES]  24.64,120.4 0 top
R194  10K  [0603-RES]  39.24,133.1 0 top
R195  2.0k  [0603-RES]  19.56,121.67 180 top
R196  10K  [0603-RES]  109.73,120.4 270 top
R197  10K  [0603-RES]  111,131.19 270 top
R198  1K  [0603-RES]  98.3,119.13 270 top
R199  2.2k  [0603-RES]  97.03,120.4 90 top
R200  2.2k  [0603-RES]  95.76,120.4 90 top
R201  10K  [0603-RES]  80.52,126.75 180 top
R202  0  [0603]  116.59,127.41 180 top
R203  DNP  [0603-RES]  115.72,126.56 90 top
R204  12k  [0603-RES]  107.19,122.94 90 top
R205  200  [0603-RES]  84.33,130.56 180 top
R206  200  [0603-RES]  98.3,129.29 0 top
R207  200  [0603-RES]  79.25,120.4 180 top
R208  200  [0603-RES]  84.33,120.4 0 top
R209  10K  [0603-RES]  98.93,133.1 0 top
R210  2.0k  [0603-RES]  79.25,121.67 180 top
R211  10K  [0603-RES]  169.42,120.4 270 top
R212  10K  [0603-RES]  170.69,131.19 270 top
R213  1K  [0603-RES]  157.99,119.13 270 top
R214  2.2k  [0603-RES]  156.72,120.4 90 top
R215  2.2k  [0603-RES]  155.45,120.4 90 top
R216  10K  [0603-RES]  140.21,126.75 180 top
R217  0  [0603]  176.28,127.41 180 top
R218  DNP  [0603-RES]  175.41,126.56 90 top
R219  12k  [0603-RES]  166.88,122.94 90 top
R220  200  [0603-RES]  144.02,130.56 180 top
R221  200  [0603-RES]  157.99,129.29 0 top
R222  200  [0603-RES]  138.94,120.4 180 top
R223  200  [0603-RES]  144.02,120.4 0 top
R224  10K  [0603-RES]  158.62,133.1 0 top
R225  2.0k  [0603-RES]  138.94,121.67 180 top
R226  10K  [0603-RES]  50.04,146.81 270 top
R227  10K  [0603-RES]  51.31,157.61 270 top
R228  1K  [0603-RES]  38.61,145.54 270 top
R229  2.2k  [0603-RES]  37.34,146.81 90 top
R230  2.2k  [0603-RES]  36.07,146.81 90 top
R231  10K  [0603-RES]  20.83,153.16 180 top
R232  0  [0603]  56.9,153.82 180 top
R233  DNP  [0603-RES]  56.03,152.97 90 top
R234  12k  [0603-RES]  47.5,149.35 90 top
R235  200  [0603-RES]  24.64,156.97 180 top
R236  200  [0603-RES]  38.61,155.7 0 top
R237  200  [0603-RES]  19.56,146.81 180 top
R238  200  [0603-RES]  24.64,146.81 0 top
R239  10K  [0603-RES]  39.24,159.51 0 top
R240  2.0k  [0603-RES]  19.56,148.08 180 top
R241  10K  [0603-RES]  109.73,146.81 270 top
R242  10K  [0603-RES]  111,157.61 270 top
R243  1K  [0603-RES]  98.3,145.54 270 top
R244  2.2k  [0603-RES]  97.03,146.81 90 top
R245  2.2k  [0603-RES]  95.76,146.81 90 top
R246  10K  [0603-RES]  80.52,153.16 180 top
R247  0  [0603]  116.59,153.82 180 top
R248  DNP  [0603-RES]  115.72,152.97 90 top
R249  12k  [0603-RES]  107.19,149.35 90 top
R250  200  [0603-RES]  84.33,156.97 180 top
R251  200  [0603-RES]  98.3,155.7 0 top
R252  200  [0603-RES]  79.25,146.81 180 top
R253  200  [0603-RES]  84.33,146.81 0 top
R254  10K  [0603-RES]  98.93,159.51 0 top
R255  2.0k  [0603-RES]  79.25,148.08 180 top
R256  10K  [0603-RES]  169.42,146.81 270 top
R257  10K  [0603-RES]  170.69,157.61 270 top
R258  1K  [0603-RES]  157.99,145.54 270 top
R259  2.2k  [0603-RES]  156.72,146.81 90 top
R260  2.2k  [0603-RES]  155.45,146.81 90 top
R261  10K  [0603-RES]  140.21,153.16 180 top
R262  0  [0603]  176.28,153.82 180 top
R263  DNP  [0603-RES]  175.41,152.97 90 top
R264  12k  [0603-RES]  166.88,149.35 90 top
R265  200  [0603-RES]  144.02,156.97 180 top
R266  200  [0603-RES]  157.99,155.7 0 top
R267  200  [0603-RES]  138.94,146.81 180 top
R268  200  [0603-RES]  144.02,146.81 0 top
R269  10K  [0603-RES]  158.62,159.51 0 top
R270  2.0k  [0603-RES]  138.94,148.08 180 top
R271  10K  [0603-RES]  50.04,173.23 270 top
R272  10K  [0603-RES]  51.31,184.02 270 top
R273  1K  [0603-RES]  38.61,171.96 270 top
R274  2.2k  [0603-RES]  37.34,173.23 90 top
R275  2.2k  [0603-RES]  36.07,173.23 90 top
R276  10K  [0603-RES]  20.83,179.58 180 top
R277  0  [0603]  56.9,180.24 180 top
R278  DNP  [0603-RES]  56.03,179.39 90 top
R279  12k  [0603-RES]  47.5,175.77 90 top
R280  200  [0603-RES]  24.64,183.39 180 top
R281  200  [0603-RES]  38.61,182.12 0 top
R282  200  [0603-RES]  19.56,173.23 180 top
R283  200  [0603-RES]  24.64,173.23 0 top
R284  10K  [0603-RES]  39.24,185.93 0 top
R285  2.0k  [0603-RES]  19.56,174.5 180 top
R286  10K  [0603-RES]  109.73,173.23 270 top
R287  10K  [0603-RES]  111,184.02 270 top
R288  1K  [0603-RES]  98.3,171.96 270 top
R289  2.2k  [0603-RES]  97.03,173.23 90 top
R290  2.2k  [0603-RES]  95.76,173.23 90 top
R291  10K  [0603-RES]  80.52,179.58 180 top
R292  0  [0603]  116.59,180.24 180 top
R293  DNP  [0603-RES]  115.72,179.39 90 top
R294  12k  [0603-RES]  107.19,175.77 90 top
R295  200  [0603-RES]  84.33,183.39 180 top